# Allegro board TinyADK-1312B-PCB.brd
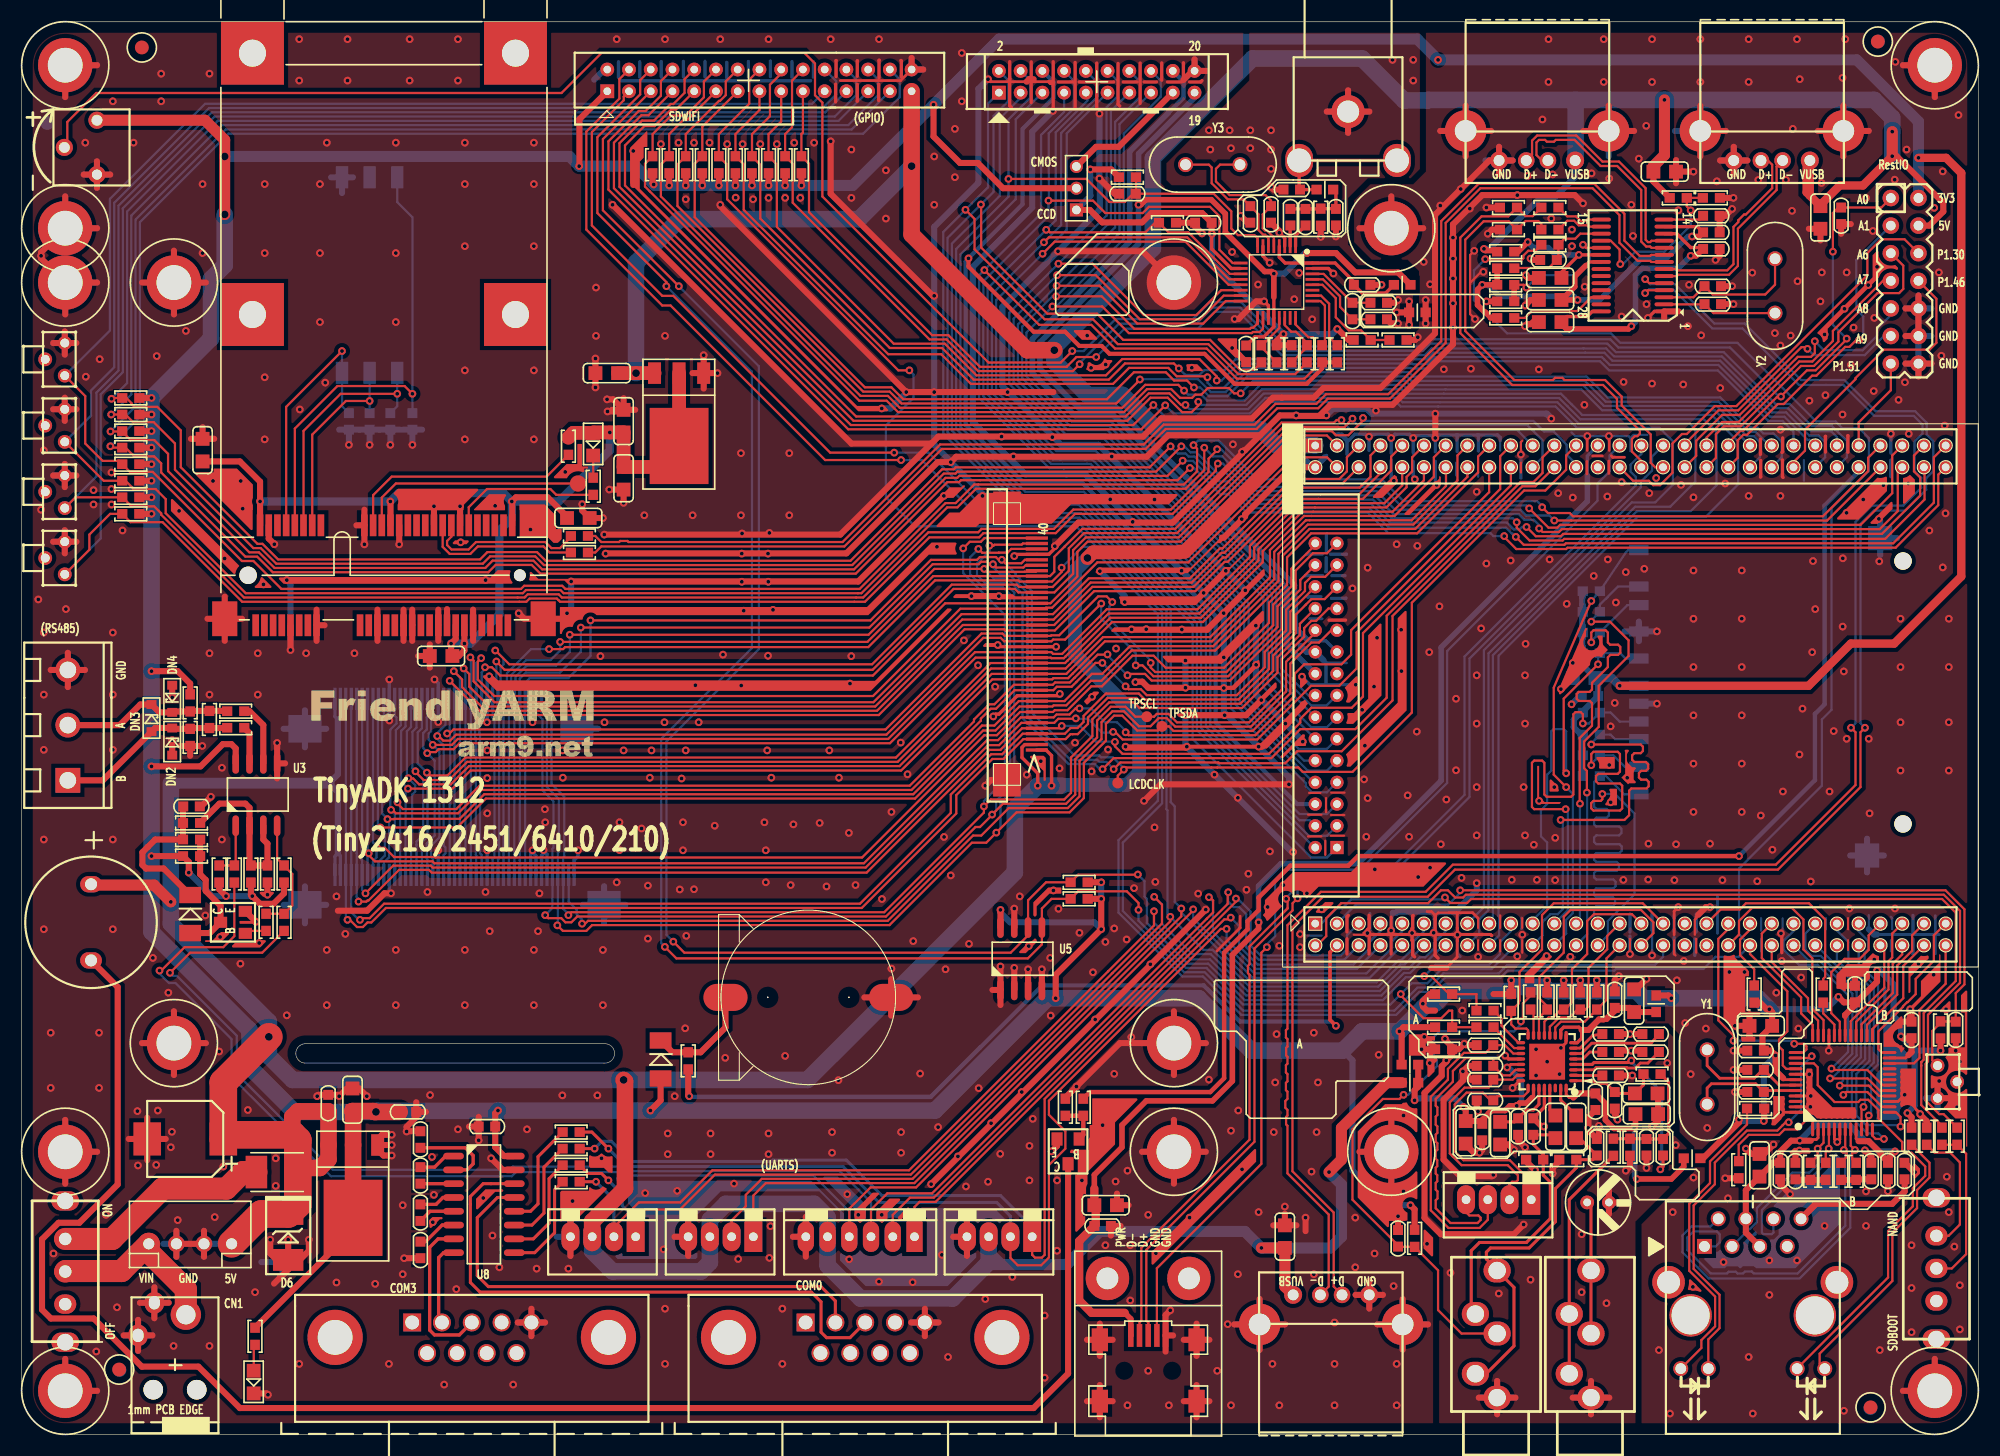
[diagram p0: board, top side]
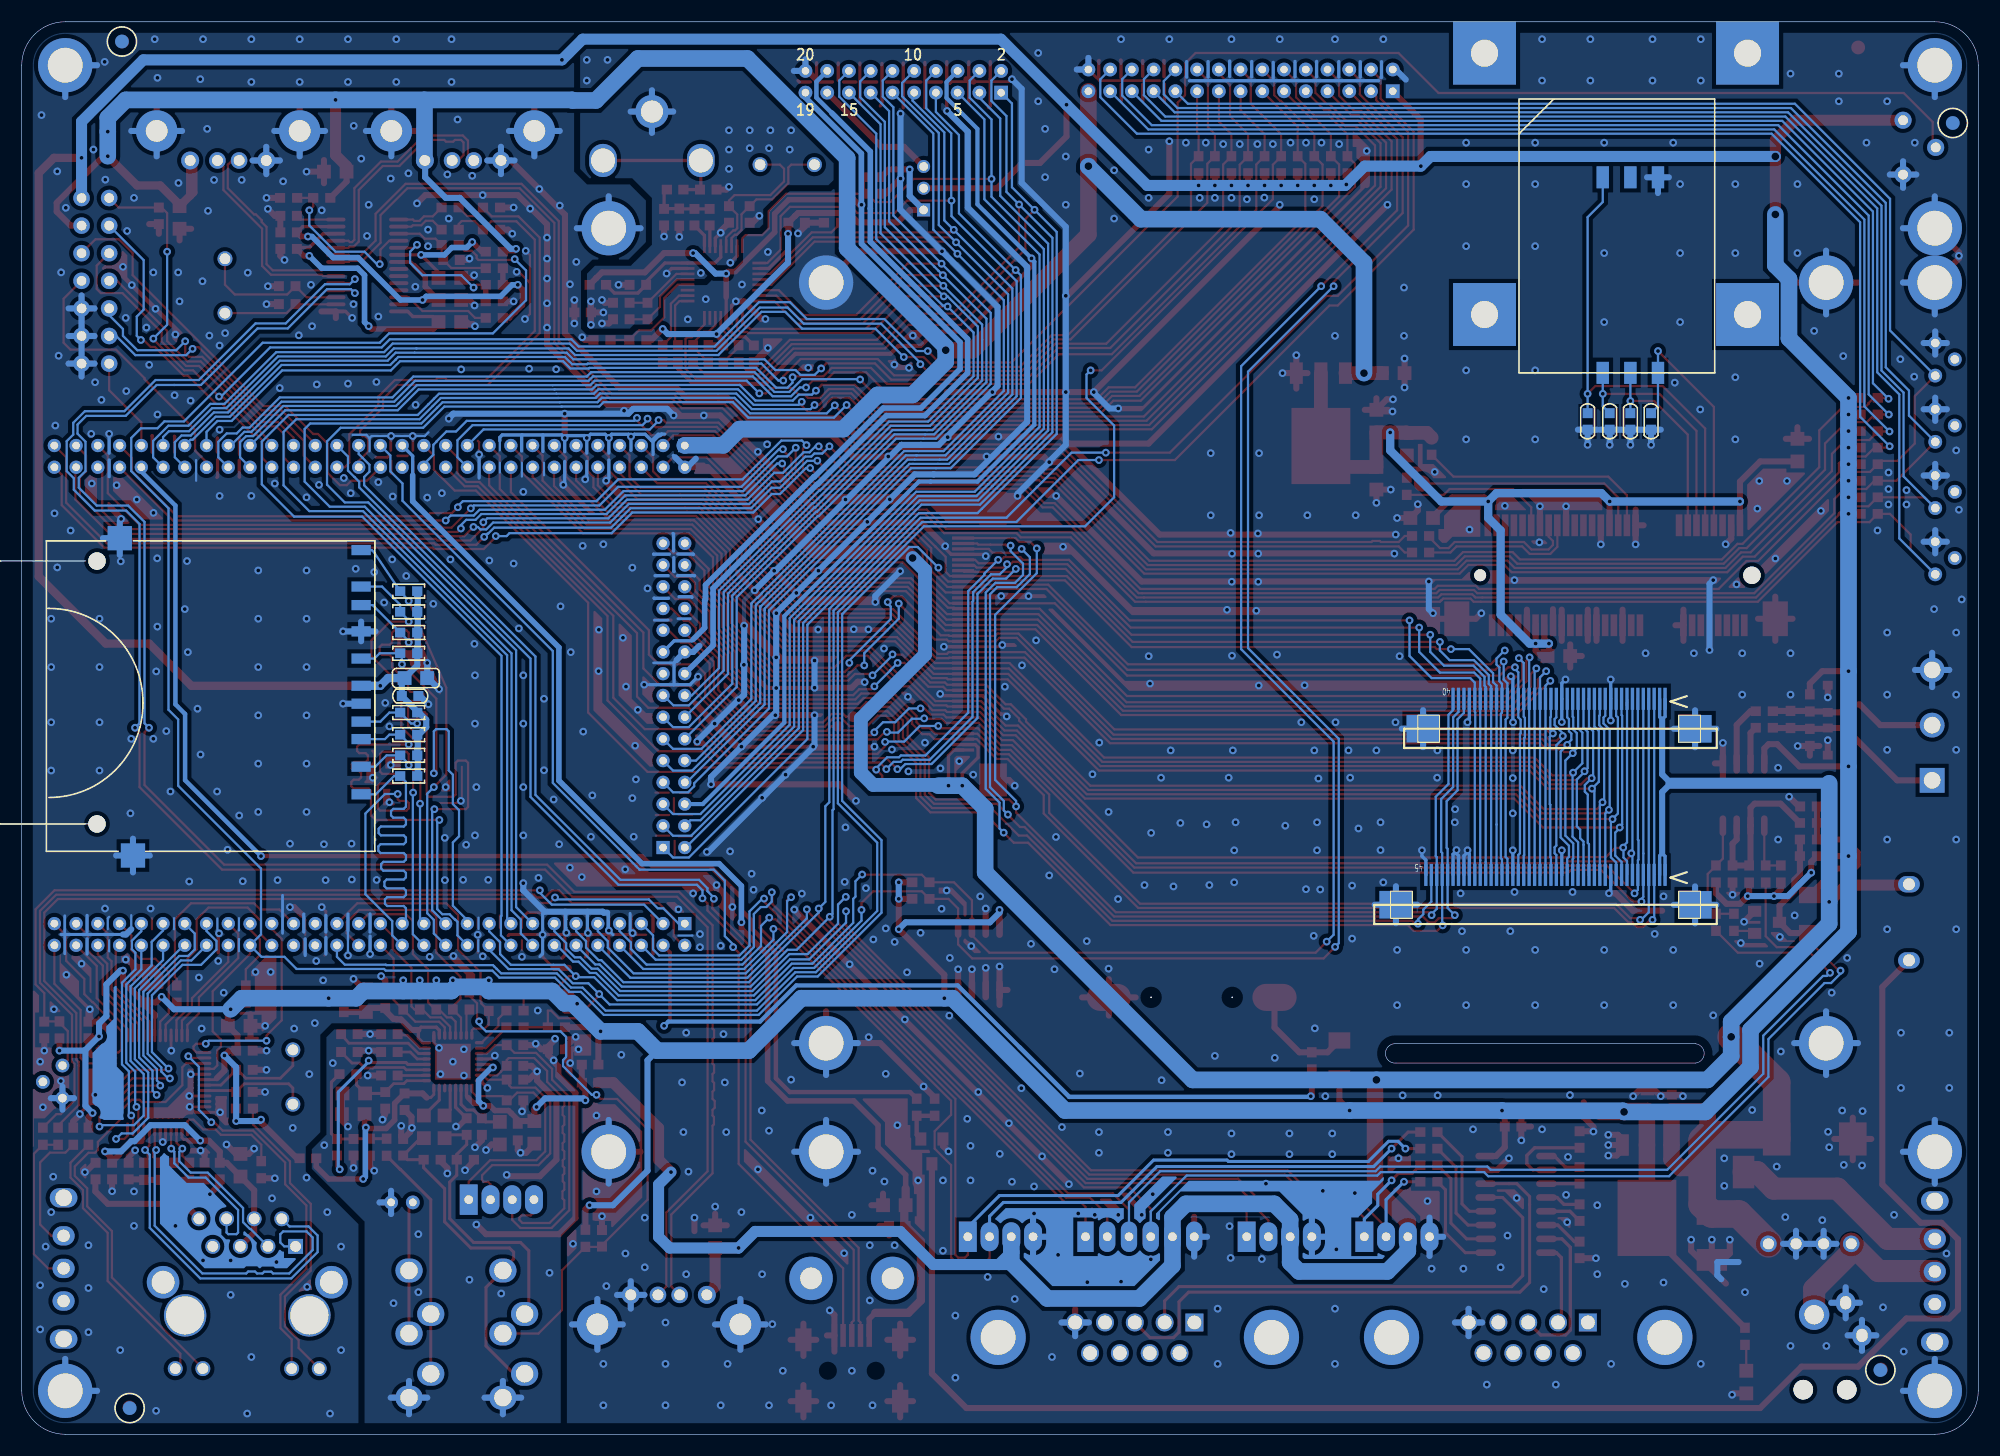
[diagram p1: board, bottom side, seen from below]

Outline 180 x 130 mm; copper layers: TOP, BOTTOM. Coordinates in mm from the lower left corner of the outline.
Outline path: 0,126 0,4 arc(1.17,1.17) 4,0 176,0 arc(178.83,1.17) 180,4 180,126 arc(178.83,128.83) 176,130 4,130 arc(1.17,128.83) 0,126 ; 26.01,35.94 53.57,35.94 arc(54.54,35.05) 53.57,34.16 26.01,34.16 arc(25.21,35.05) 26.01,35.94

## Design rules (mm)
net group PWR_PH: nets VDD_5V

## Placement (name value [footprint] x y rotation side)
AVIN  -  [TVOUT]  117.52 117.23 270 top
BAT1  3V-BATTERY  [BAT600]  64.74 40.21 90 top
BUZZER1  Buzzer  [SPEAKER]  6.38 50.37 270 top
C7  100pF  [C0603]  14.86 57.78 0 top
C8  220uF/16V  [CAP-D6M3]  18.54 27.18 180 top
C9  104  [C0603]  28.19 29.72 90 top
C10  10uF  [C0805]  30.43 29.74 90 top
C11  104  [C0603]  34.77 29.67 0 top
C12  104  [C0603]  177.93 37.97 270 top
C15  10uF  [C0805]  161.04 37.59 180 top
C16  104  [C0603]  173.86 36.45 90 top
C17  104  [C0603]  168.66 39.75 90 top
C18  104  [C0603]  160.27 35.31 180 top
C19  15pF  [C0603]  160.28 33.54 180 top
C20  15pF  [C0603]  160.28 31.51 180 top
C21  104  [C0603]  173.21 24.99 270 top
C22  10uF  [C0805]  159.88 23.72 90 top
C23  104  [C0603]  171.69 24.99 270 top
C24  104  [C0603]  161.78 24.99 270 top
C25  104  [C0603]  170.16 23.46 90 top
C26  104  [C0603]  163.18 23.46 90 top
C29  104  [C0603]  134.37 28.57 270 top
C30  10uF  [C0805]  132.84 28.83 270 top
C31  104  [C0603]  144.78 31.37 270 top
C32  10uF  [C0805]  148.46 29.46 0 top
C33  100pF  [C0603]  139.06 27.56 90 top
C34  100pF  [C0603]  144.91 25.65 90 top
C35  104  [C0603]  126.62 17.27 90 top
C36  1uF  [C0603]  151 27.18 270 top
C37  100pF  [C0603]  135.38 30.73 180 top
C38  100pF  [C0603]  135.38 32.64 180 top
C39  104  [C0603]  36.68 23.06 90 top
C40  104  [C0603]  36.68 27.89 270 top
C41  220pF  [C0603]  149.48 27.18 270 top
C42  1uF  [C0603]  149.1 35.18 0 top
C43  1uF  [C0603]  145.41 35.18 0 top
C44  1uF  [C0603]  145.41 33.02 0 top
C45  1uF  [C0603]  145.41 36.83 0 top
C46  1uF  [C0603]  150.62 36.83 180 top
C47  100pF  [C0603]  135.38 33.91 180 top
C48  100pF  [C0603]  135.38 35.81 180 top
C49  104  [C0603]  36.68 16.21 90 top
C50  104  [C0603]  146.56 39.24 90 top
C51  10uF  [C0805]  98.68 21.08 0 top
C52  104  [C0603]  98.68 19.18 0 top
C53  104/NC  [C0603]  118.11 112.78 270 top
C54  10uF  [C0805]  148.34 38.86 90 top
C55  10uF  [C0805]  143 29.34 270 top
C56  10uF  [C0805]  141.1 29.34 270 top
C57  10uF  [C0805]  136.02 26.67 90 top
C58  104  [C0603]  137.67 29.08 270 top
C59  10uF  [C0805]  150.5 31.37 180 top
C60  104  [C0603]  146.56 31.5 270 top
C61  104  [C0603]  36.68 21.16 270 top
C62  104  [C0603]  143.51 67.94 0 bottom
C63  104  [C0603]  116.71 112.78 270 top
C64  104  [C0603]  167.39 112.9 270 top
C65  330pF  [C0603]  120.9 112.78 270 top
C67  10uF  [C0805]  144.78 69.6 180 bottom
C68  104  [C0603]  43.56 28.32 180 top
C73  10uF  [C0805]  165.48 113.03 270 top
C76  33pF  [C0603]  30.1 93.98 270 bottom
C77  33pF  [C0603]  33.91 93.98 270 bottom
C78  33pF  [C0603]  35.94 93.98 270 bottom
C79  33pF  [C0603]  32 93.98 270 bottom
C96  10uF  [C0805]  150.11 116.2 0 top
C97  10uF  [C0805]  116.21 17.15 90 top
C104  330pF  [C0603]  117.6 114.55 180 top
C105  104  [C0603]  107.95 111.51 0 top
C106  104  [C0603]  112.65 98.68 90 top
C107  104  [C0603]  124.08 105.79 180 top
C108  22pF  [C0603]  113.03 113.03 270 top
C109  22pF  [C0603]  114.94 113.03 270 top
C110  1uF  [C0603]  122.43 102.62 90 top
C111  1uF  [C0603]  125.6 102.62 180 top
C112  1uF  [C0603]  125.6 104.14 180 top
C113  104  [C0603]  100.97 114.17 0 top
C137  NC  [C0603]  154.81 104.01 0 top
C142  NC  [C0603]  154.81 105.66 0 top
C143  10uF  [C0805]  55.37 92.2 90 top
C144  10uF  [C0805]  39.62 71.63 180 top
C145  10uF  [C0805]  139.57 102.36 0 top
C146  104  [C0603]  156.21 109.09 180 top
C147  10uF  [C0805]  139.57 106.43 0 top
C148  10uF  [C0805]  50.16 84.33 0 top
C149  10uF  [C0805]  16.64 89.53 90 top
C150  10uF  [C0805]  55.37 89.03 270 top
C151  10uF  [C0805]  54.86 97.66 180 top
C153  10uF  [C0805]  139.57 104.39 0 top
C161  104  [C0603]  156.21 110.62 180 top
C162  104  [C0603]  141.22 108.08 180 top
CAMERA  SIP10x2s  [SDWIFI-NH]  98.9 124.48 0 top
CN1  -  [DC023B]  14.1 6.35 90 top
COM0  -  [DB9RA_M]  77.6 10.29 90 top
COM3  -  [DB9RA_M]  41.4 10.29 90 top
CON1  -  [PH-4A]  92.96 18.18 180 top
CON2  -  [PH-6A]  82.13 18.18 180 top
CON3  -  [PH-4A]  67.31 18.18 180 top
CON4  -  [PH-4A]  56.48 18.18 180 top
CON5  -  [2510-4A]  15.5 17.53 180 top
CON6  SIP7X2  [SIP7X2-2]  173.23 106.16 270 top
CON8  MF210_miniPCIe  [MINI_PCIEX1-52P-4H]  33.32 79.06 0 top
CON10  SD/MMC CARD  [SDCARD]  167.33 61.27 0 bottom
CON11  B2L-508-3P  [DP3-5]  4.24 65.27 90 top
CON12  -  [PH-4A]  138.88 21.59 180 top
CON13  SIP15x2s  [SIP30S]  62.87 124.61 0 top
D1  1N4148  [D1206]  58.77 32.73 90 top
D2  1N4148  [D1206]  15.49 46.12 90 top
D4  Green-LED  [LED0805]  52.57 92.16 270 top
D6  TVS-5.6V  [DO-214AA-SMB]  24.51 18.16 270 top
DN2  TVS-DUAL/NC  [SOD-323-12]  13.84 63.75 90 top
DN3  TVS-DUAL/NC  [SOD-323-12]  11.94 65.91 90 top
DN4  TVS-DUAL/NC  [SOD-323-12]  13.84 67.69 270 top
F1  2A  [F3528]  23.62 24.38 0 top
FB1  0R/NC  [L0603]  127.71 34.02 0 top
FB2  0R  [L0603]  153.67 25.4 180 top
FB3  0R  [L0603]  127.71 32.36 0 top
FB5  0R  [L0603]  150.37 39.62 270 top
H1  Hole  [H1]  4 4 0 top
H2  Hole  [H1]  4 126 0 top
H3  Hole  [H1]  176 126 0 top
H4  Hole  [H1]  176 4 0 top
H5  Hole  [H1]  4 26 0 top
H6  Hole  [H1]  106 26 0 top
H7  Hole  [H1]  4 106 0 top
H8  Hole  [H1]  4 111 0 top
H9  Hole  [H1]  14 36 0 top
H10  Hole  [H1]  14 106 0 top
H11  Hole  [H1]  106 36 0 top
H12  Hole  [H1]  126 26 0 top
H13  Hole  [H1]  106 106 0 top
H14  Hole  [H1]  126 111 0 top
ID1  ID-BOARD  [FM4P]  9 5.91 180 bottom
ID2  ID-BOARD  [FM4P]  170.76 128.18 0 top
ID3  ID-BOARD  [FM4P]  170.78 128.18 180 bottom
ID4  ID-BOARD  [FM4P]  170.09 2.48 0 top
ID5  ID-BOARD  [FM4P]  2.34 120.68 180 bottom
ID6  ID-BOARD  [FM4P]  11.05 127.64 0 top
ID7  ID-BOARD  [FM4P]  170.07 2.41 180 bottom
ID8  ID-BOARD  [FM4P]  8.96 5.96 0 top
J1  SIP3s  [SIP3S]  97.03 112.68 90 top
K1  -  [KEY-A06]  2.16 98.93 270 top
K2  -  [KEY-A06]  2.16 92.84 270 top
K3  -  [KEY-A06]  2.16 86.74 270 top
K4  -  [KEY-A06]  2.16 80.64 270 top
L6  0R  [L0603]  119.89 114.55 0 top
L8  0R  [L0603]  127 105.79 180 top
L9  0R  [L0603]  128.4 103.25 0 top
LAN1  -  [HR911105A]  159.26 21.44 180 top
LCD1  FPC-P05-45P  [CON-FPC-P05-45P]  25.65 52.45 0 bottom
LCD2  FPC-P05-40P  [CON-FPC-P05-40P]  94.36 59.82 90 top
LCD3  FPC-P05-40P  [CON-FPC-P05-40P]  25.65 68.66 0 bottom
LCDCLK  Test Point  [TPC1]  100.84 59.94 0 top
LED_3.3  Red-LED  [LED0805]  21.34 5.84 270 top
MIC1  MIC  [MIC2]  144.02 21.34 0 top
MIC2  PHONEJACK-Pink  [EARJACK5]  144.27 16.24 270 top
MINIUSB1  MiniUSB  [MINIUSB_ANT]  103.63 5.84 0 top
NOREF  -  []  26.02 61.54 0 top
P2  SIMCARD  [SIM-0011]  34.75 115.69 180 bottom
PERST_N  Test Point  [PADC15]  51.18 87.5 0 top
Q2  MMBT3904AL  [SOT-23-Q]  96.27 26.04 180 top
Q3  MMBT3904AL  [SOT-23-Q]  19.43 47.12 90 top
R1  0R  [R0603]  176.66 27.43 90 top
R2  0R  [R0603]  178.05 27.43 270 top
R3  0R  [R0603]  175.26 27.43 270 top
R4  1K  [R0603]  21.46 9.02 270 top
R5  10K  [R0603]  159.38 40.51 270 top
R6  1K  [R0603]  97.66 30.1 90 top
R7  0R  [R0603]  165.74 40.51 90 top
R8  6.8K,1%  [R0603]  157.97 24.35 270 top
R9  10K  [R0603]  97.28 50.8 180 top
R10  10K  [R0603]  97.28 49.28 180 top
R11  0R  [R0603]  61.32 34.37 270 top
R12  10K  [R0603]  59.56 116.84 270 top
R13  10K  [R0603]  62.61 116.84 270 top
R14  10K  [R0603]  65.66 116.84 270 top
R15  10K  [R0603]  176.53 37.21 270 top
R16  10K  [R0603]  96.01 30.1 270 top
R17  10K/NC  [R0603]  21.08 51.56 90 top
R18  10K  [R0603]  68.71 116.84 270 top
R19  10K  [R0603]  71.73 116.84 270 top
R20  1K  [R0603]  159.51 29.98 180 top
R21  1K  [R0603]  173.86 27.43 270 top
R22  100K  [R0603]  15.49 64.14 90 top
R23  10K  [R0603]  61.09 116.84 90 top
R24  51R  [R0603]  167.37 24.2 270 top
R25  51R  [R0603]  168.77 24.2 270 top
R26  51R  [R0603]  164.57 24.2 270 top
R27  10K  [R0603]  58.04 116.84 90 top
R28  10K  [R0603]  64.14 116.84 90 top
R29  51R  [R0603]  165.97 24.2 270 top
R30  10K/NC  [R0603]  22.61 51.56 270 top
R31  120R/NC  [R0603]  17.27 65.79 90 top
R32  100K  [R0603]  15.49 67.31 90 top
R33  10R  [R0603]  19.68 65.02 180 top
R34  10K  [R0603]  67.18 116.84 90 top
R35  10K  [R0603]  10.03 89.28 0 top
R36  10R  [R0603]  19.68 66.55 180 top
R37  10K  [R0603]  10.03 87.76 0 top
R38  10K  [R0603]  144.4 62.48 180 bottom
R39  10K  [R0603]  10.03 86.23 0 top
R40  10K  [R0603]  10.03 84.71 0 top
R41  10K  [R0603]  144.4 71.88 180 bottom
R42  10K  [R0603]  144.4 64.39 180 bottom
R43  10K  [R0603]  10.03 95.38 180 top
R44  0R  [R0603]  24.13 47.12 90 top
R45  0R  [R0603]  19.56 51.56 90 top
R46  10K  [R0603]  142.24 25.27 0 top
R47  10K  [R0603]  139.19 25.27 0 top
R48  100K  [R0603]  24.13 51.56 90 top
R49  100K  [R0603]  128.14 18.03 90 top
R50  10K  [R0603]  15.62 53.21 0 top
R51  4.7K  [R0603]  22.48 47.12 270 top
R52  1M  [R0603]  15.62 54.74 0 top
R53  0R  [R0603]  15.62 56.26 180 top
R54  75R  [R0603]  119.51 112.01 270 top
R55  10K  [R0603]  50.29 90.93 90 top
R56  0R  [R0603]  50.55 27.81 180 top
R57  0R  [R0603]  134.62 38.99 0 top
R58  0R  [R0603]  134.62 37.47 0 top
R59  2.2K  [R0603]  149.99 33.15 180 top
R60  10K  [R0603]  70.23 116.84 90 top
R61  200R  [R0603]  52.58 87.25 90 top
R62  47K/NC  [R0603]  147.96 26.42 90 top
R63  0R  [R0603]  130.81 35.43 0 top
R64  10K  [R0603]  10.03 93.85 180 top
R65  10K  [R0603]  10.03 92.33 180 top
R66  10K  [R0603]  10.03 90.81 180 top
R67  100R  [R0603]  146.43 26.42 90 top
R68  0R  [R0603]  51.31 82.68 0 top
R69  0R  [R0603]  51.31 81.15 0 top
R70  0R  [R0603]  50.55 26.29 180 top
R71  10K  [R0603]  144.4 66.42 180 bottom
R72  10K  [R0603]  144.4 75.69 180 bottom
R73  10K  [R0603]  144.4 73.79 180 bottom
R74  10K  [R0603]  144.4 60.58 180 bottom
R75  0R  [R0603]  50.55 23.24 180 top
R76  0R  [R0603]  50.55 24.77 180 top
R77  10K  [R0603]  144.4 77.6 180 bottom
R78  10K  [R0603]  18.16 51.56 90 top
R92  0R  [R0603]  138.81 39.88 270 top
R103  2.7K,1%  [C0603]  154.69 112.14 0 top
R104  0R  [R0603]  140.59 110.87 180 top
R105  0R  [R0603]  140.59 112.9 180 top
R106  NC  [R0603]  140.59 109.47 180 top
R107  100K  [R0603]  136.53 107.31 180 top
R108  10K  [R0603]  152.4 113.79 0 top
R109  15K  [R0603]  136.78 112.9 0 top
R110  15K  [R0603]  136.78 110.87 0 top
R111  20K  [R0603]  155.45 113.79 0 top
R114  10K  [R0603]  136.53 105.79 0 top
R115  NC  [R0603]  136.53 104.27 180 top
R116  10K  [R0603]  136.53 102.74 180 top
R117  0R  [R0603]  136.53 108.84 180 top
R126  2.2K  [R0603]  130.81 37.47 180 top
R127  2.2K  [R0603]  130.81 40.51 180 top
R128  10K  [R0603]  137.03 39.75 90 top
R129  10K  [R0603]  140.34 39.88 90 top
R131  10K  [R0603]  141.86 39.88 90 top
R132  10K  [R0603]  143.38 39.88 90 top
R133  10K  [R0603]  144.91 39.88 90 top
R137  0R  [R0603]  121.03 99.44 270 top
R138  NC  [R0603]  119.63 99.44 270 top
R139  10K  [R0603]  105.41 111.51 180 top
R140  0R  [R0603]  114.05 99.44 90 top
R141  0R  [R0603]  118.24 99.44 90 top
R142  10K  [R0603]  126.62 100.71 180 top
R143  1.2K/NC  [R0603]  115.44 99.44 270 top
R144  1.2K/NC  [R0603]  116.84 99.44 90 top
R145  0R  [R0603]  123.32 100.71 0 top
R146  10K  [R0603]  101.73 115.7 0 top
RST  -  [KEY-A06]  178.05 32.44 90 top
S1  SW-DIP4  [SW35]  4 15 270 top
S2  SW-DIP4  [SW35]  176.15 15.24 90 top
SPK1  PHONEJACK-Green  [EARJACK5]  135.64 16.24 270 top
TINYBOARD  TinyCore  [TINY6410_2]  116 43 0 top
TPSCL  TP  [TPC1]  103.5 66.04 0 top
TPSDA  TP  [TPC1]  104.9 65.15 0 top
U2  AMS1086CM-3.3  [TO-252]  32.74 26.62 180 top
U3  SP3485  [SOP8]  19.68 56.01 90 top
U4  DM9000AEP  [LQFP48FA]  167.51 32.38 0 top
U5  AT24LC04  [SOP8]  90.04 40.89 90 top
U6  WM8960GEFL  [QFN32-19P7-TH]  140.34 34.29 180 top
U8  SP3232  [SOP16]  39.73 25.6 0 top
U9  TVP5150  [S-PQFP-G32]  115.44 106.05 270 top
U17  AMS1086CM-3.3  [TO-252]  62.74 97.66 180 top
U52  FE1.1s  [TSSOP28-25P6X228]  148.21 107.57 90 top
USBH1  USB -A2  [USB-A2]  164.5 117.23 0 top
USBH2  USB -A2  [USB-A2]  142.91 117.23 0 top
USBH3  USB -A2  [USB-A2]  116.97 12.83 180 top
W1  10K  [VR3_7X7]  5.92 117.3 90 top
Y1  25MHz  [OSC2PR-1]  155.06 35.32 270 top
Y2  12MHz  [OSC2PR-1]  161.3 103.25 90 top
Y3  14.31818MHz  [OSC2PR-1]  112.01 116.85 180 top

## Library data of the parts
AVIN = TVOUT
BAT1 = BATTERY_3
BUZZER1 = SPEAKER
C7 C9 C11 C12 C16-C21 C23-C26 C29-C50 C52-C65 C68 C73 C76-C79 C96 C97 C104-C113 C137 C142-C151 C153 C161 C162 = CAP NP
C8 C10 C15 C22 C51 C67 = CAP
CAMERA = CON20A
CN1 = CON3_3
COM0 COM3 = CONNECTOR DB9_2
CON1 CON3-CON5 = CON4
CON2 = CON6
CON6 = CON14A
CON8 = CON50A_5
CON10 = SD_0
CON11 J1 = CON3
CON12 = J1X4_1
CON13 = CON20A_5
D1 = DIODE
D2 = DIODE_1
D4 LED_3.3 = LED
D6 = DIODE ZENER1_8
DN2-DN4 = DTVS_DUAL_CA_KKJ_1
F1 = FUSE
FB1-FB3 FB5 L6 L8 L9 = INDUCTOR
H1-H14 = CON1
ID1-ID8 = ID-BOARD
K1-K4 RST = SW PUSHBUTTON_0
LAN1 = HR911105A
LCD1 = LCD-888_1
LCD2 LCD3 = LCD-888_2
LCDCLK PERST_N TPSCL TPSDA = TP
MIC1 = MIC
MIC2 SPK1 = PHONEJACK STEREO SW
MINIUSB1 = USB_A/B_2
P2 = SIMCARD
Q2 Q3 = NPN-BEC
R1-R47 R49 R53 R55-R78 R92 R103-R111 R114-R117 R126-R129 R131-R133 = R
R48 R50-R52 R54 R137-R146 = RESISTOR
S1 S2 = CON5
TINYBOARD = TinyCore
U2 U17 = AMS1117
U3 = SP3485
U4 = DM9000AEP
U5 = AT24LC04
U6 = WM8960GEFL_0
U8 = SP3232
U9 = TVP5150
U52 = CON28C_1
USBH1-USBH3 = USBPORT_0
W1 = RESISTOR VAR_0
Y1-Y3 = CRYSTAL

## Footprints (pads in the part's own frame, mm; a bottom-side part is the same pattern mirrored in y, then rotated)
2510-4A
  round 1.524 hole 1.016: 1(-3.81,0) 2(-1.27,0) 3(1.27,0) 4(3.81,0)
BAT600
  oval 2.489x4.064 smd: 1(0,0) 2(0,-15.24)
  round 0.127 hole 1.194: 3(0,-3.886) 4(0,-11.354)
C0603
  rect 0.914x0.914 smd: 1(0,0) 2(1.524,0)
C0805
  rect 1.27x1.27 smd: 1(0,0) 2(2.083,0)
CAP-D6M3
  rect 2.54x3.048 smd: 1(0,0) 2(7,0)
CON-FPC-P05-40P
  rect 0.305x2.032 smd: 1(3.16,0.968) 2(3.66,0.968) 3(4.16,0.968) 4(4.66,0.968) 5(5.16,0.968) 6(5.66,0.968) 7(6.161,0.968) 8(6.661,0.968) 9(7.161,0.968) 10(7.661,0.968) 11(8.161,0.968) 12(8.661,0.968) 13(9.161,0.968) 14(9.661,0.968) 15(10.162,0.968) 16(10.662,0.968) 17(11.162,0.968) 18(11.662,0.968) 19(12.162,0.968) 20(12.662,0.968) 21(13.162,0.968) 22(13.662,0.968) 23(14.163,0.968) 24(14.663,0.968) 25(15.163,0.968) 26(15.663,0.968) 27(16.163,0.968) 28(16.663,0.968) 29(17.163,0.968) 30(17.663,0.968) 31(18.164,0.968) 32(18.664,0.968) 33(19.164,0.968) 34(19.664,0.968) 35(20.164,0.968) 36(20.664,0.968) 37(21.164,0.968) 38(21.664,0.968) 39(22.165,0.968) 40(22.665,0.968)
  rect 3.048x2.54 smd: A(0.399,3.726) B(25.42,3.713)
CON-FPC-P05-45P
  rect 0.305x2.032 smd: 1(3.16,0.968) 2(3.66,0.968) 3(4.16,0.968) 4(4.66,0.968) 5(5.16,0.968) 6(5.66,0.968) 7(6.16,0.968) 8(6.661,0.968) 9(7.161,0.968) 10(7.661,0.968) 11(8.161,0.968) 12(8.661,0.968) 13(9.161,0.968) 14(9.661,0.968) 15(10.161,0.968) 16(10.662,0.968) 17(11.162,0.968) 18(11.662,0.968) 19(12.162,0.968) 20(12.662,0.968) 21(13.162,0.968) 22(13.662,0.968) 23(14.163,0.968) 24(14.663,0.968) 25(15.163,0.968) 26(15.663,0.968) 27(16.163,0.968) 28(16.663,0.968) 29(17.163,0.968) 30(17.663,0.968) 31(18.163,0.968) 32(18.664,0.968) 33(19.164,0.968) 34(19.664,0.968) 35(20.164,0.968) 36(20.664,0.968) 37(21.164,0.968) 38(21.664,0.968) 39(22.164,0.968) 40(22.665,0.968) 41(23.165,0.968) 42(23.665,0.968) 43(24.165,0.968) 44(24.665,0.968) 45(25.165,0.968)
  rect 3.048x2.54 smd: A(0.399,3.726) B(27.92,3.714)
D1206
  rect 1.5x2 smd: 1(0.009,-0.006) 2(3.51,-0.006)
DB9RA_M
  rect 1.651x1.651 hole 1.27: 1(0,5.486)
  round 1.651 hole 1.27: 2(0,2.743) 3(0,0) 4(0,-2.743) 5(0,-5.486) 6(-2.819,4.115) 7(-2.819,1.372) 8(-2.819,-1.372) 9(-2.819,-4.115)
  round 5.08 hole 3.2: 10(-1.372,12.573) 11(-1.372,-12.573)
DC023B
  round 1.803 hole 1.803 unplated: (-2.25,2) (-2.25,-2)
  round 2.794 hole 1.778: 1(4.65,-1)
  oval 1.981x1.778 hole 1.219x1.016: 2(5.75,1.9) 3(2.75,3.4)
DO-214AA-SMB
  rect 2.007x2.794 smd: 1(2.115,0) 2(-2.115,0)
DP3-5
  rect 2.286x2.286 hole 1.524: 1(-5.08,0)
  round 2.286 hole 1.524: 2(0,0) 3(5.08,0)
EARJACK5
  oval 2.2x2.5 hole 1.6: 1(5.17,-1.903) 2(6.97,0.097) 3(1.17,0.097) 4(10.67,-1.903) 5(12.87,0.097)
F3528
  rect 1.981x2.997 smd: 1(-2.032,-0.254) 2(1.778,-0.254)
FM4P
  round 1.27 smd: 1(0,0)
H1
  round 5 hole 3.2: 1(0,0)
HR911105A
  round 3.9 hole 3.5 unplated: (-5.707,10.498) (5.723,10.498)
  rect 1.372x1.372 hole 0.991: 1(4.453,4.148)
  round 1.372 hole 0.991: 2(3.183,1.608) 3(1.913,4.148) 4(0.643,1.608) 5(-0.627,4.148) 6(-1.897,1.608) 7(-3.167,4.148) 8(-4.437,1.608) 9(6.633,15.398) 10(4.093,15.398) 11(-4.077,15.398) 12(-6.617,15.398)
  round 2.997 hole 2.1: M3(-7.737,7.448) M4(7.753,7.448)
KEY-A06
  round 1.27 hole 0.787: 1(1.5,1.8) 2(-1.5,1.8) 3(0,0)
L0603
  rect 0.94x0.889 smd: 1(-0.762,0) 2(0.762,0)
LED0805
  rect 1.27x1.27 smd: 1(0,0) 2(2.083,0)
LQFP48FA
  oval 0.279x1.27 smd: 1(-2.75,-4.327) 2(-2.25,-4.327) 3(-1.75,-4.327) 4(-1.25,-4.327) 5(-0.75,-4.327) 6(-0.25,-4.327) 7(0.25,-4.327) 8(0.75,-4.327) 9(1.25,-4.327) 10(1.75,-4.327) 11(2.25,-4.327) 12(2.75,-4.327) 25(2.75,4.327) 26(2.25,4.327) 27(1.75,4.327) 28(1.25,4.327) 29(0.75,4.327) 30(0.25,4.327) 31(-0.25,4.327) 32(-0.75,4.327) 33(-1.25,4.327) 34(-1.75,4.327) 35(-2.25,4.327) 36(-2.75,4.327)
  oval 1.27x0.279 smd: 13(4.327,-2.75) 14(4.327,-2.25) 15(4.327,-1.75) 16(4.327,-1.25) 17(4.327,-0.75) 18(4.327,-0.25) 19(4.327,0.25) 20(4.327,0.75) 21(4.327,1.25) 22(4.327,1.75) 23(4.327,2.25) 24(4.327,2.75) 37(-4.327,2.75) 38(-4.327,2.25) 39(-4.327,1.75) 40(-4.327,1.25) 41(-4.327,0.75) 42(-4.327,0.25) 43(-4.327,-0.25) 44(-4.327,-0.75) 45(-4.327,-1.25) 46(-4.327,-1.75) 47(-4.327,-2.25) 48(-4.327,-2.75)
MIC2
  round 1.27 hole 0.711: 1(0,0) 2(2,0)
MINI_PCIEX1-52P-4H
  round 1.6 hole 1.6 unplated: (-12.5,0)
  rect 5.791x5.791 hole 2.489: (-12.1,48.05) (-12.1,24) (12.1,48.05) (12.1,24)
  round 1.092 hole 1.092 unplated: (12.5,0)
  rect 0.61x2.007 smd: 1(-11.8,-4.6) 2(-11.4,4.6) 3(-11,-4.6) 4(-10.6,4.6) 5(-10.2,-4.6) 6(-9.8,4.6) 7(-9.4,-4.6) 8(-9,4.6) 9(-8.6,-4.6) 10(-8.2,4.6) 11(-7.8,-4.6) 12(-7.4,4.6) 13(-7,-4.6) 14(-6.6,4.6) 15(-6.2,-4.6) 16(-5.8,4.6) 17(-2.2,-4.6) 18(-1.8,4.6) 19(-1.4,-4.6) 20(-1,4.6) 21(-0.6,-4.6) 22(-0.2,4.6) 23(0.2,-4.6) 24(0.6,4.6) 25(1,-4.6) 26(1.4,4.6) 27(1.8,-4.6) 28(2.2,4.6) 29(2.6,-4.6) 30(3,4.6) 31(3.4,-4.6) 32(3.8,4.6) 33(4.2,-4.6) 34(4.6,4.6) 35(5,-4.6) 36(5.4,4.6) 37(5.8,-4.6) 38(6.2,4.6) 39(6.6,-4.6) 40(7,4.6) 41(7.4,-4.6) 42(7.8,4.6) 43(8.2,-4.6) 44(8.6,4.6) 45(9,-4.6) 46(9.4,4.6) 47(9.8,-4.6) 48(10.2,4.6) 49(10.6,-4.6) 50(11,4.6) 51(11.4,-4.6) 52(11.8,4.6)
  rect 2.311x3.2 smd: M1(-14.65,-4) M2(14.65,-4)
MINIUSB_ANT
  round 4 hole 2 unplated: (-3.75,8.5) (3.75,8.5)
  round 0 hole 0.889 unplated: (-2.2,0) (2.2,0)
  rect 0.508x2.108 smd: 1(-1.6,3.25) 2(-0.8,3.25) 3(0,3.25) 4(0.8,3.25) 5(1.6,3.25)
  rect 1.499x2.108 smd: 6(4.45,2.85) 7(-4.45,2.85) 8(-4.45,-2.8) 9(4.45,-2.8)
OSC2PR-1
  round 1.372 hole 0.991: 1(-0.064,0) 2(4.94,0)
PADC15
  round 1.5 smd: 1(0,0)
PH-4A
  rect 1.651x2.8 hole 0.8: 1(0,0)
  oval 1.651x2.667 hole 0.8: 2(2,0) 3(4,0) 4(6,0)
PH-6A
  rect 1.499x2.8 hole 0.8: 1(0,0)
  oval 1.499x2.8 hole 0.8: 2(2,0) 3(4,0) 4(6,0) 5(8,0) 6(10,0)
QFN32-19P7-TH
  oval 0.813x0.305 smd: 1(-2.425,1.75) 2(-2.425,1.25) 3(-2.425,0.75) 4(-2.425,0.25) 5(-2.425,-0.25) 6(-2.425,-0.75) 7(-2.425,-1.25) 8(-2.425,-1.75) 17(2.425,-1.75) 18(2.425,-1.25) 19(2.425,-0.75) 20(2.425,-0.25) 21(2.425,0.25) 22(2.425,0.75) 23(2.425,1.25) 24(2.425,1.75)
  oval 0.305x0.813 smd: 9(-1.75,-2.425) 10(-1.25,-2.425) 11(-0.75,-2.425) 12(-0.25,-2.425) 13(0.25,-2.425) 14(0.75,-2.425) 15(1.25,-2.425) 16(1.75,-2.425) 25(1.75,2.425) 26(1.25,2.425) 27(0.75,2.425) 28(0.25,2.425) 29(-0.25,2.425) 30(-0.75,2.425) 31(-1.25,2.425) 32(-1.75,2.425)
  rect 3.302x3.302 smd: G1(0,0)
R0603
  rect 0.94x0.889 smd: 1(-0.787,0) 2(0.787,0)
S-PQFP-G32
  rect 1.27x0.254 smd: 1(-3.3,1.75) 2(-3.3,1.25) 3(-3.3,0.75) 4(-3.3,0.25) 5(-3.3,-0.25) 6(-3.3,-0.75) 7(-3.3,-1.25) 8(-3.3,-1.75) 17(3.3,-1.75) 18(3.3,-1.25) 19(3.3,-0.75) 20(3.3,-0.25) 21(3.3,0.25) 22(3.3,0.75) 23(3.3,1.25) 24(3.3,1.75)
  rect 0.254x1.27 smd: 9(-1.75,-3.3) 10(-1.25,-3.3) 11(-0.75,-3.3) 12(-0.25,-3.3) 13(0.25,-3.3) 14(0.75,-3.3) 15(1.25,-3.3) 16(1.75,-3.3) 25(1.75,3.3) 26(1.25,3.3) 27(0.75,3.3) 28(0.25,3.3) 29(-0.25,3.3) 30(-0.75,3.3) 31(-1.25,3.3) 32(-1.75,3.3)
SDCARD
  round 1.6 hole 1.6 unplated: (5.748,-19.095) (5.748,5.104)
  rect 1.778x0.94 smd: 1(-18.552,-0.168) 2(-18.552,-2.708) 3(-18.552,-5.967) 4(-18.552,-7.612) 5(-18.552,-10.119) 6(-18.552,-12.619) 7(-18.552,-15.039) 8(-18.552,-16.744) 9(-18.552,2.372) 10(-18.552,-20.104) 11(-18.552,-4.316)
  rect 2.235x2.235 smd: 12(2.438,8.009) 13(3.652,-21.199)
SDWIFI-NH
  rect 1.27x1.27 hole 0.7: 1(-9,-1)
  round 1.27 hole 0.7: 2(-9,1) 3(-7,-1) 4(-7,1) 5(-5,-1) 6(-5,1) 7(-3,-1) 8(-3,1) 9(-1,-1) 10(-1,1) 11(1,-1) 12(1,1) 13(3,-1) 14(3,1) 15(5,-1) 16(5,1) 17(7,-1) 18(7,1) 19(9,-1) 20(9,1)
SIM-0011
  rect 1.143x2.032 smd: 1(5.28,-18) 2(2.74,-18) 3(0.2,-18) 4(5.28,0) 5(2.74,0) 6(0.2,0)
SIP3S
  rect 1.2x1.2 hole 0.8: 1(0,0)
  round 1.2 hole 0.8: 2(2,0) 3(4,0)
SIP7X2-2
  round 1.524 hole 0.889: 1(-7.62,-1.27) 2(-7.62,1.27) 3(-5.08,-1.27) 4(-5.08,1.27) 5(-2.54,-1.27) 6(-2.54,1.27) 7(0,-1.27) 8(0,1.27) 9(2.54,-1.27) 10(2.54,1.27) 11(5.08,-1.27) 12(5.08,1.27) 13(7.62,-1.27) 14(7.62,1.27)
SIP30S
  rect 1.27x1.27 hole 0.7: 1(-9,-1)
  round 1.27 hole 0.7: 2(-9,1) 3(-7,-1) 4(-7,1) 5(-5,-1) 6(-5,1) 7(-3,-1) 8(-3,1) 9(-1,-1) 10(-1,1) 11(1,-1) 12(1,1) 13(3,-1) 14(3,1) 15(5,-1) 16(5,1) 17(7,-1) 18(7,1) 19(9,-1) 20(9,1) 21(11,-1) 22(11,1) 23(13,-1) 24(13,1) 25(15,-1) 26(15,1) 27(17,-1) 28(17,1) 29(19,-1) 30(19,1)
SOD-323-12
  rect 0.813x0.914 smd: 1(-1.25,0) 2(1.25,0)
SOP8
  oval 1.905x0.61 smd: 1(0,0) 2(0,-1.27) 3(0,-2.54) 4(0,-3.81) 5(5.74,-3.81) 6(5.74,-2.54) 7(5.74,-1.27) 8(5.74,0)
SOP16
  oval 1.905x0.61 smd: 1(0,0) 2(0,-1.27) 3(0,-2.54) 4(0,-3.81) 5(0,-5.08) 6(0,-6.35) 7(0,-7.62) 8(0,-8.89) 9(5.588,-8.89) 10(5.588,-7.62) 11(5.588,-6.35) 12(5.588,-5.08) 13(5.588,-3.81) 14(5.588,-2.54) 15(5.588,-1.27) 16(5.588,0)
SOT-23-Q
  rect 1.016x1.219 smd: B(-1.016,-1.143) C(0,1.143) E(1.016,-1.143)
SPEAKER
  oval 1.5x2 hole 1.1: 1(-0.254,0) 2(6.754,0)
SW35
  oval 1.778x2.54 hole 1.524: 1(-6.477,0) 5(6.523,0)
  oval 1.778x2.032 hole 1.143: 2(-2.977,0) 3(0.023,0) 4(3.023,0)
TINY6410_2
  rect 1.219x1.219 hole 0.711: A1(3,48) B1(3,4) C1(5,11)
  round 1.219 hole 0.711: A2(3,46) A3(5,48) A4(5,46) A5(7,48) A6(7,46) A7(9,48) A8(9,46) A9(11,48) A10(11,46) A11(13,48) A12(13,46) A13(15,48) A14(15,46) A15(17,48) A16(17,46) A17(19,48) A18(19,46) A19(21,48) A20(21,46) A21(23,48) A22(23,46) A23(25,48) A24(25,46) A25(27,48) A26(27,46) A27(29,48) A28(29,46) A29(31,48) A30(31,46) A31(33,48) A32(33,46) A33(35,48) A34(35,46) A35(37,48) A36(37,46) A37(39,48) A38(39,46) A39(41,48) A40(41,46) A41(43,48) A42(43,46) A43(45,48) A44(45,46) A45(47,48) A46(47,46) A47(49,48) A48(49,46) A49(51,48) A50(51,46) A51(53,48) A52(53,46) A53(55,48) A54(55,46) A55(57,48) A56(57,46) A57(59,48) A58(59,46) A59(61,48) A60(61,46) B2(3,2) B3(5,4) B4(5,2) B5(7,4) B6(7,2) B7(9,4) B8(9,2) B9(11,4) B10(11,2) B11(13,4) B12(13,2) B13(15,4) B14(15,2) B15(17,4) B16(17,2) B17(19,4) B18(19,2) B19(21,4) B20(21,2) B21(23,4) B22(23,2) B23(25,4) B24(25,2) B25(27,4) B26(27,2) B27(29,4) B28(29,2) B29(31,4) B30(31,2) B31(33,4) B32(33,2) B33(35,4) B34(35,2) B35(37,4) B36(37,2) B37(39,4) B38(39,2) B39(41,4) B40(41,2) B41(43,4) B42(43,2) B43(45,4) B44(45,2) B45(47,4) B46(47,2) B47(49,4) B48(49,2) B49(51,4) B50(51,2) B51(53,4) B52(53,2) B53(55,4) B54(55,2) B55(57,4) B56(57,2) B57(59,4) B58(59,2) B59(61,4) B60(61,2) C2(3,11) C3(5,13) C4(3,13) C5(5,15) C6(3,15) C7(5,17) C8(3,17) C9(5,19) C10(3,19) C11(5,21) C12(3,21) C13(5,23) C14(3,23) C15(5,25) C16(3,25) C17(5,27) C18(3,27) C19(5,29) C20(3,29) C21(5,31) C22(3,31) C23(5,33) C24(3,33) C25(5,35) C26(3,35) C27(5,37) C28(3,37) C29(5,39) C30(3,39)
TO-252
  rect 1.194x1.981 smd: 1(0,0) 2(2.261,0) 3(4.521,0)
  rect 5.41x7.01 smd: 4(2.261,6.706)
TPC1
  round 1 smd: 1(0,0)
TSSOP28-25P6X228
  oval 0.356x1.778 smd: 1(-4.227,-2.896) 2(-3.576,-2.896) 3(-2.926,-2.896) 4(-2.276,-2.896) 5(-1.626,-2.896) 6(-0.975,-2.896) 7(-0.325,-2.896) 8(0.325,-2.896) 9(0.975,-2.896) 10(1.626,-2.896) 11(2.276,-2.896) 12(2.926,-2.896) 13(3.576,-2.896) 14(4.227,-2.896) 15(4.227,2.896) 16(3.576,2.896) 17(2.926,2.896) 18(2.276,2.896) 19(1.626,2.896) 20(0.975,2.896) 21(0.325,2.896) 22(-0.325,2.896) 23(-0.975,2.896) 24(-1.626,2.896) 25(-2.276,2.896) 26(-2.926,2.896) 27(-3.576,2.896) 28(-4.227,2.896)
TVOUT
  oval 3.048x2.54 hole 2.21: 1(0,0) 2(0,9)
  round 3.048 hole 2.032: 3(-4.5,4.5)
USB-A2
  round 1.651 hole 1: 1(0,0) 4(-7,0)
  round 1.524 hole 1: 2(-2.504,0) 3(-4.498,0)
  round 3.81 hole 2: 5(3.084,2.718) 6(-10.074,2.718)
VR3_7X7
  round 1.575 hole 0.9: 1(-1.36,-1) 2(3.64,-1) 3(1.14,2)

## Nets
AGND: C29.2 C30.2 C31.2 C32.2 C33.2 C34.2 C37.2 C38.2 C41.2 C42.1 C43.2 C44.2 C45.2 C46.2 C47.2 C48.2 C57.1 C58.2 C59.1 C60.2 MIC1.2 MIC2.5(E) R46.1 R47.1 R62.1 R63.2 SPK1.5(E) U6.20(SPKGND2) U6.24(SPKGND1) U6.28(AGND)
AVDD_CCD_1.8V: C107.2 L8.2 U9.4(PLL_AVDD) U9.32(CH2_AVDD)
GND: BAT1.2(-) C7.2 C8.2 C9.2 C10.2 C11.2 C12.2 C15.2 C16.2 C17.2 C18.2 C19.2 C20.2 C21.1 C22.2 C23.2 C24.2 C25.2 C26.2 C35.2 C40.1 C49.1 C50.2 C51.2 C52.2 C54.2 C62.1 C64.2 C67.2 C68.2 C73.2 C76.2 C77.2 C78.2 C79.2 C96.2 C97.2 C105.1 C106.1 C113.1 C137.2 C142.2 C143.2 C144.2 C145.1 C146.1 C147.1 C148.2 C149.2 C150.2 C151.2 C153.1 C161.1 C162.2 CAMERA.20 CN1.2 CN1.3 COM0.5 COM3.5 CON1.4 CON2.6 CON3.4 CON4.4 CON5.2 CON5.3 CON6.10 CON6.12 CON6.14 CON8.4(GND1) CON8.9(GND2) CON8.15(GND3) CON8.18(GND4) CON8.21(GND5) CON8.26(GND6) CON8.27(GND7) CON8.29(GND8) CON8.34(GND9) CON8.35(GND10) CON8.37(GND11) CON8.40(GND12) CON8.43(GND13) CON8.M1 CON8.M2 CON10.3(GND2) CON10.6(GND1) CON10.12(PAD1) CON10.13(PAD2) CON11.3 CON13.2 CON13.30 D6.1(A) DN2.1 DN4.1 H1.1 H2.1 H3.1 H4.1 H5.1 H6.1 H7.1 H8.1 H9.1 H10.1 H11.1 H12.1 H13.1 H14.1 K1.2 K2.2 K3.2 K4.2 L9.2 LCD1.11(GND1) LCD1.20(GND2) LCD1.29(GND3) LCD1.37(GND4) LCD1.38(GND5) LCD1.39(GND6) LCD1.40(GND7) LCD1.45(GND8) LCD1.A LCD1.B LCD2.11(GND1) LCD2.20(GND2) LCD2.29(GND3) LCD2.37(SCL2) LCD2.A LCD2.B LCD3.11(GND1) LCD3.20(GND2) LCD3.29(GND3) LCD3.37(SCL2) LCD3.A LCD3.B LED_3.3.2(CATHODE) MINIUSB1.5(GND) MINIUSB1.6(#6) MINIUSB1.7(#7) MINIUSB1.8(#8) MINIUSB1.9(#9) P2.4(GND) Q2.E(EMITTER) Q3.E(EMITTER) R3.1 R8.2 R16.1 R22.1 R30.2 R63.1 R103.2 R109.1 R110.1 R111.2 R115.2 R139.1 R142.1 RST.2 TINYBOARD.A2 TINYBOARD.C20 U2.1(GND) U3.5(GND) U4.5(AGND2) U4.6(AGND3) U4.15(GND) U4.33(GND2) U4.41(TEST) U4.45(GND1) U4.47(AGND1) U4.48(BGGND) U5.1(A0) U5.2(A1) U5.3(A2) U5.4(GND) U5.7(WP) U6.9(DGND) U6.G1(GND_PADDLE) U8.15(VSS) U9.19(DGND) U17.1(GND) U52.1(VSS) USBH1.4(GND1) USBH1.5(GND3) USBH1.6(GND2) USBH2.4(GND1) USBH2.5(GND3) USBH2.6(GND2) USBH3.4(GND1) USBH3.5(GND3) USBH3.6(GND2) W1.1(A)
GND_EARTH: C21.2 LAN1.8(CHS_GND)
VBAT: BAT1.1(+) D1.2(K) R11.1
VDD_3.3V: C10.1 C11.1 C15.1 C16.1 C17.1 C18.1 C62.2 C67.1 C68.1 CON6.2 CON10.4(VDD) CON13.1 D1.1(A) FB1.1 FB2.1 FB5.1 J1.2 R4.1 R5.2 R9.1 R10.1 R12.2 R13.2 R14.2 R15.2 R17.1 R18.2 R19.2 R20.1 R21.1 R23.1 R27.1 R28.1 R32.2 R34.1 R35.2 R37.2 R38.2 R39.2 R40.2 R41.2 R42.2 R43.1 R48.1 R49.2 R50.1 R60.1 R64.1 R65.1 R66.1 R71.2 R72.2 R73.2 R74.2 R77.2 R78.1 R126.2 R127.2 R128.2 R129.2 R131.2 R132.2 R133.2 U2.2(VOUT) U2.4(TAB) U3.8(VCC) U4.23(VDD1) U4.30(VDD2) U4.42(VDD3) U5.8(VDD) U8.16(VDD) W1.2(B)
VDD_3G_3.3V: C143.1 C144.1 C148.1 C149.1 C150.1 CON8.2(VDD_3V3A) CON8.24(VDD_3V3B) CON8.39(VDD_3V3C) CON8.41(VDD_3V3D) CON8.52(VDD_3V3E) D4.1(ANODE) R55.2 U17.2(VOUT) U17.4(TAB)
VDD_5V: BUZZER1.1 C8.1 C9.1 C73.1 C96.1 C97.1 C151.1 CON1.3 CON2.5 CON3.3 CON4.3 CON5.1 CON6.4 CON13.29 D6.2(K) F1.2 FB3.1 LCD1.1(VDD5V_1) LCD1.2(VDD5V_2) LCD2.1(VDD5V_1) LCD2.2(VDD5V_2) LCD3.1(VDD5V_1) LCD3.2(VDD5V_2) R108.1 R117.2 TINYBOARD.A1 U2.3(VIN) U17.3(VIN) USBH1.1(VBUS) USBH2.1(VBUS) USBH3.1(VBUS)
VDD_AUDIO_A3.3V: C31.1 C32.1 FB2.2 U6.32(AVDD)
VDD_AUDIO_D3.3V: C50.1 C54.1 FB5.2 U6.8(DCVDD) U6.10(DBVDD)
VDD_AUDIO_SPK: C29.1 C30.1 FB1.2 FB3.2 U6.21(SPKVDD2) U6.26(SPKVDD1)
VDD_CAM_1.8V: C106.2 CAMERA.19 L8.1 TINYBOARD.C19 U9.20(DVDD)
VDD_CAM_2.5V: CAMERA.18 TINYBOARD.C18
VDD_CCD_3.3V: C105.2 J1.1 R143.1 R144.2 R145.1 R146.1 U9.10(IO_DVDD)
VDD_CMOS_3.3V: CAMERA.17 J1.3
VDD_IN: CN1.1 CON5.4 S1.3
VDD_RTC_AP: R11.2 TINYBOARD.B4
VDD_USB_1.8V: C145.2 C146.2 U52.12(VD18_O) U52.28(VD18)
VDD_USB_3.3V: C153.2 C161.2 R107.2 R114.1 R116.2 U52.13(VD33) U52.21(VD33_O)
AUDIO_XI2SCDCLK0: R133.1 TINYBOARD.B30 U6.11(MCLK)
AUDIO_XI2SLRCK0: R131.1 TINYBOARD.B31 U6.13(DACLRC)
AUDIO_XI2SSCLK0: R132.1 TINYBOARD.B29 U6.12(BCLK)
AUDIO_XI2SSDI0: R128.1 TINYBOARD.B33 U6.16(ADCDAT)
AUDIO_XI2SSDO0_0: R129.1 TINYBOARD.B32 U6.14(DATDAT)
CAM_A_RESET: C113.2 CAMERA.4 R146.2 TINYBOARD.C4 U9.8(R\E\S\E\T\B\)
CAM_SCL0: CAMERA.2 R140.1 TINYBOARD.C2
CAM_SDA0: CAMERA.1 R141.1 TINYBOARD.C1
CAMERA_A_GPIO2: CAMERA.3 TINYBOARD.C3
CCD_AGND: AVIN.3(GND) C65.2 C104.2 C107.1 C108.2 C109.2 C111.1 C112.1 L9.1 R54.2 U9.3(PLL_AGND) U9.7(NSUB) U9.31(CH1_AGND)
CCD_SCL: R140.2 R143.2 U9.21(SCL)
CCD_SDA: R141.2 R144.1 U9.22(SDA)
DM2-: U52.4(DM4) USBH3.2(D-)
DM3-: U52.6(DM3) USBH1.2(D-)
DM4-: U52.10(DM1) USBH2.2(D-)
DM9000_RX+: LAN1.3(RX+) R26.1 U4.3(RX+)
DM9000_RX-: LAN1.6(RX-) R29.1 U4.4(RX-)
DM9000_TX+: LAN1.1(TD+) R24.1 U4.7(TX+)
DM9000_TX-: LAN1.2(TD-) R25.1 U4.8(TX-)
DP2+: U52.5(DP4) USBH3.3(D+)
DP3+: U52.7(DP3) USBH1.3(D+)
DP4+: U52.11(DP1) USBH2.3(D+)
EARPHONE_DETECT: C35.1 R49.1 R92.1 SPK1.2(B)
LANLED: LAN1.11(LEDY-) U4.39(LED1)
LINKLED: LAN1.10(LEDG-) U4.38(LED2)
M_NRESET: C12.1 R15.1 RST.1 TINYBOARD.B3
MICBIAS: C59.2 C60.1 R59.2 U6.1(MICBIAS)
NET_AVDD25: C22.1 C23.1 C24.1 LAN1.4(CT2) LAN1.5(CT1) U4.2(AVDD25_2) U4.9(AVDD25_1)
NWAIT: R5.1 TINYBOARD.B41
OM1: R1.2 TINYBOARD.B1
RS485A: CON11.2 DN3.2 DN4.2 R31.2 R32.1 R36.2
RS485B: CON11.1 DN2.2 DN3.1 R22.2 R31.1 R33.2
RSRXD0: COM0.2 U8.13(RIN1)
RSRXD3: COM3.2 U8.8(RIN2)
RSTXD0: COM0.3 U8.14(T1OUT)
RSTXD3: COM3.3 U8.7(T2OUT)
SPK_OUT_LN: C38.1 CON12.2 U6.23(SPK_LN)
SPK_OUT_LP: C37.1 CON12.1 U6.25(SPK_LP)
SPK_OUT_RN: C48.1 CON12.3 U6.19(SPK_RN)
SPK_OUT_RP: C47.1 CON12.4 U6.22(SPK_RP)
USB-3G_DP: R68.2 U52.9(DP2)
USB_3G_DM: R69.2 U52.8(DM2)
USIM_CLK: C77.1 CON8.12(USIM_CLK) P2.3(CLK)
USIM_DATA: C78.1 CON8.10(USIM_DATA) P2.6(DATA)
USIM_RST: C79.1 CON8.14(USIM_RESET) P2.2(RST)
USIM_VCC: C76.1 CON8.8(USIM_POWER) P2.1(VCC)
W_DISABLE_N: CON8.20(W_DISABLE_N) R55.1
WIFI0_PD_GPIO: CON13.11 R12.1 TINYBOARD.A41
WIFI0_RESET_GPIO: CON13.12 R27.2 TINYBOARD.A42
XADCAIN0: C64.1 CON6.1 TINYBOARD.A39 W1.3(WIPER)
XADCAIN1: CON6.3 TINYBOARD.A40
XADCAIN6_YM: CON6.5 TINYBOARD.A38
XADCAIN7_YP: CON6.7 TINYBOARD.A37
XADCAIN8_XM: CON6.9 TINYBOARD.A36
XADCAIN9_XP: CON6.11 TINYBOARD.A35
XCICLKENB: CAMERA.5 TINYBOARD.C5
XCIHREF: CAMERA.6 R137.2 R138.2 TINYBOARD.C6
XCIPCLK: CAMERA.8 TINYBOARD.C8 U9.9(SCLK)
XCIVSYNC: CAMERA.7 TINYBOARD.C7 U9.24(VSYNC/PALI)
XCIYDATA0: CAMERA.16 TINYBOARD.C16 U9.18(YOUT0)
XCIYDATA1: CAMERA.15 TINYBOARD.C15 U9.17(YOUT1)
XCIYDATA2: CAMERA.14 TINYBOARD.C14 U9.16(YOUT2)
XCIYDATA3: CAMERA.13 TINYBOARD.C13 U9.15(YOUT3)
XCIYDATA4: CAMERA.12 TINYBOARD.C12 U9.14(YOUT4)
XCIYDATA5: CAMERA.11 TINYBOARD.C11 U9.13(YOUT5)
XCIYDATA6: CAMERA.10 TINYBOARD.C10 U9.12(YOUT6)
XCIYDATA7: CAMERA.9 R139.2 TINYBOARD.C9 U9.11(YOUT7/I2CSEL)
XDACOUT: CON6.13 TINYBOARD.A51
XEINT6_SD0_NWP: CON10.10(WP) R77.1 TINYBOARD.B24
XEINT7: TINYBOARD.B40 U4.34(INT)
XEINT8: CON6.6 TINYBOARD.A30
XEINT9: CON13.16 R28.2 TINYBOARD.B34
XEINT10: LCD1.31(EINT10) LCD2.31(EINT10) LCD3.31(EINT10) TINYBOARD.A22
XEINT11: CON6.8 TINYBOARD.A46
XEINT14: LCD1.43(EINT14) LCD2.40(EINT15) LCD3.40(EINT15) TINYBOARD.C24
XEINT15: LCD1.44(EINT15) TINYBOARD.C22
XEINT16/KP_COL0: CON13.21 K1.1 R35.1 TINYBOARD.A53
XEINT17/KP_COL1: CON13.22 K2.1 R37.1 TINYBOARD.A54
XEINT18/KP_COL2: CON13.23 K3.1 R39.1 TINYBOARD.A55
XEINT19/KP_COL3: CON13.24 K4.1 R40.1 TINYBOARD.A56
XEINT24/KP_ROW0: CON13.25 R43.2 TINYBOARD.A57
XEINT25/KP_ROW1: CON13.26 R64.2 TINYBOARD.A58
XEINT26/KP_ROW2: CON13.27 R65.2 TINYBOARD.A59
XEINT27/KP_ROW3: CON13.28 R66.2 TINYBOARD.A60
XI2CSCL0: CON13.5 R9.2 R57.1 R127.1 TINYBOARD.B19 U5.6(SCL)
XI2CSCL2/IEM_SPWI: LCD1.41(SCL2) LCD2.38(EINT14) LCD3.38(EINT14) TINYBOARD.C23 TPSCL.1
XI2CSDA0: CON13.6 R10.2 R58.1 R126.1 TINYBOARD.B20 U5.5(SDA)
XI2CSDA2/IEM_SCLK: LCD1.42(SDA2) LCD2.39(SDA2) LCD3.39(SDA2) TINYBOARD.C21 TPSDA.1
XM0ADDR0: TINYBOARD.B35
XM0ADDR1: TINYBOARD.B36
XM0ADDR2: R7.2 TINYBOARD.B37
XM0ADDR3: TINYBOARD.B38
XM0CSN1: TINYBOARD.B39 U4.37(CS#)
XM0DATA0: TINYBOARD.B45 U4.18(SD0)
XM0DATA1: TINYBOARD.B46 U4.17(SD1)
XM0DATA2: TINYBOARD.B47 U4.16(SD2)
XM0DATA3: TINYBOARD.B48 U4.14(SD3)
XM0DATA4: TINYBOARD.B49 U4.13(SD4)
XM0DATA5: TINYBOARD.B50 U4.12(SD5)
XM0DATA6: TINYBOARD.B51 U4.11(SD6)
XM0DATA7: TINYBOARD.B52 U4.10(SD7)
XM0DATA8: TINYBOARD.B53 U4.31(SD8)
XM0DATA9: TINYBOARD.B54 U4.29(SD9)
XM0DATA10: TINYBOARD.B55 U4.28(SD10)
XM0DATA11: TINYBOARD.B56 U4.27(SD11)
XM0DATA12: TINYBOARD.B57 U4.26(SD12)
XM0DATA13: TINYBOARD.B58 U4.25(SD13)
XM0DATA14: TINYBOARD.B59 U4.24(SD14)
XM0DATA15: TINYBOARD.B60 U4.22(SD15)
XM0OEN: TINYBOARD.B44 U4.35(IOR#)
XM0WEN: TINYBOARD.B43 U4.36(IOW#)
XMMC0CDN: CON10.11(NCD) R71.1 TINYBOARD.B23
XMMC0DATA0: CON10.7(DAT0) R73.1 TINYBOARD.B25
XMMC0DATA1: CON10.8(DAT1) R72.1 TINYBOARD.B26
XMMC0DATA2: CON10.9(DAT2) R74.1 TINYBOARD.B27
XMMC0DATA3: CON10.1(CD/DAT3) R38.1 TINYBOARD.B28
XMMC2CDN/SPI_MISO2: CON13.15 R14.1 TINYBOARD.A45
XMMC2CLK/SPI_CLK2: CON13.13 R13.1 TINYBOARD.A43
XMMC2CMD/SPI_CSN2: CON13.14 R23.2 TINYBOARD.A44
XMMC2DATA0/SPI_MOSI2: CON13.17 R18.1 TINYBOARD.A47
XMMC2DATA1: CON13.18 R34.2 TINYBOARD.A48
XMMC2DATA2: CON13.19 R19.1 TINYBOARD.A49
XMMC2DATA3: CON13.20 R60.2 TINYBOARD.A50
XMMCCLK0: CON10.5(CLK) R41.1 TINYBOARD.B21
XMMCCMD0: CON10.2(CMD) R42.1 TINYBOARD.B22
XNRSTOUT: LCD1.32(NRESET) LCD2.32(NRESET) LCD3.32(NRESET) R106.2 TINYBOARD.B42 U4.40(PWRST#)
XPWMTOUT0: R6.2 TINYBOARD.A52
XPWMTOUT1: LCD1.30(TOUT1) LCD2.30(TOUT1) LCD3.30(TOUT1) TINYBOARD.A26
XSPICKL1: CON13.9 TINYBOARD.B17
XSPICS1: CON13.10 TINYBOARD.B18
XSPIMISO1: CON13.8 TINYBOARD.B16
XSPIMOSI1: CON13.7 TINYBOARD.B15
XUCTSN1: CON2.2 TINYBOARD.B6
XUHDM: R105.2 R109.2 TINYBOARD.A32
XUHDP: R104.2 R110.2 TINYBOARD.A34
XUODM: MINIUSB1.2(D-) TINYBOARD.A31
XUODP: MINIUSB1.3(D+) TINYBOARD.A33
XUODRVVBUS: TINYBOARD.A28
XUOID: MINIUSB1.4(ID) TINYBOARD.A29
XUOVBUS: C51.1 C52.1 MINIUSB1.1(VBUS) TINYBOARD.A27
XURTSN1: CON2.1 TINYBOARD.B5
XURXD0: CON1.2 R56.1 TINYBOARD.B8
XURXD1: CON2.4 R45.1 TINYBOARD.B10
XURXD2: CON3.2 CON13.4 TINYBOARD.B12
XURXD3: CON4.2 R75.1 TINYBOARD.B14
XUTXD0: CON1.1 R70.1 TINYBOARD.B7
XUTXD1: CON2.3 R44.1 TINYBOARD.B9
XUTXD2: CON3.1 CON13.3 TINYBOARD.B11
XUTXD3: CON4.1 R76.1 TINYBOARD.B13
XVHSYNC: LCD1.35(HSYNC) LCD2.35(HSYNC) LCD3.35(HSYNC) TINYBOARD.A24
XVVCLK: LCD1.36(VCLK) LCD2.36(VCLK) LCD3.36(VCLK) LCDCLK.1 TINYBOARD.A25
XVVD0: LCD1.3(VD0) LCD2.3(VD0) LCD3.3(VD0) TINYBOARD.C25
XVVD1: LCD1.4(VD1) LCD2.4(VD1) LCD3.4(VD1) TINYBOARD.C26
XVVD2: LCD1.5(VD2) LCD2.5(VD2) LCD3.5(VD2) TINYBOARD.A20
XVVD3: LCD1.6(VD3) LCD2.6(VD3) LCD3.6(VD3) TINYBOARD.A19
XVVD4: LCD1.7(VD4) LCD2.7(VD4) LCD3.7(VD4) TINYBOARD.A18
XVVD5: LCD1.8(VD5) LCD2.8(VD5) LCD3.8(VD5) TINYBOARD.A17
XVVD6: LCD1.9(VD6) LCD2.9(VD6) LCD3.9(VD6) TINYBOARD.A16
XVVD7: LCD1.10(VD7) LCD2.10(VD7) LCD3.10(VD7) TINYBOARD.A15
XVVD8: LCD1.12(VD8) LCD2.12(VD8) LCD3.12(VD8) TINYBOARD.C27
XVVD9: LCD1.13(VD9) LCD2.13(VD9) LCD3.13(VD9) TINYBOARD.C28
XVVD10: LCD1.14(VD10) LCD2.14(VD10) LCD3.14(VD10) TINYBOARD.A14
XVVD11: LCD1.15(VD11) LCD2.15(VD11) LCD3.15(VD11) TINYBOARD.A13
XVVD12: LCD1.16(VD12) LCD2.16(VD12) LCD3.16(VD12) TINYBOARD.A12
XVVD13: LCD1.17(VD13) LCD2.17(VD13) LCD3.17(VD13) TINYBOARD.A11
XVVD14: LCD1.18(VD14) LCD2.18(VD14) LCD3.18(VD14) TINYBOARD.A10
XVVD15: LCD1.19(VD15) LCD2.19(VD15) LCD3.19(VD15) TINYBOARD.A9
XVVD16: LCD1.21(VD16) LCD2.21(VD16) LCD3.21(VD16) TINYBOARD.C29
XVVD17: LCD1.22(VD17) LCD2.22(VD17) LCD3.22(VD17) TINYBOARD.C30
XVVD18: LCD1.23(VD18) LCD2.23(VD18) LCD3.23(VD18) TINYBOARD.A8
XVVD19: LCD1.24(VD19) LCD2.24(VD19) LCD3.24(VD19) TINYBOARD.A7
XVVD20: LCD1.25(VD20) LCD2.25(VD20) LCD3.25(VD20) TINYBOARD.A6
XVVD21: LCD1.26(VD21) LCD2.26(VD21) LCD3.26(VD21) TINYBOARD.A5
XVVD22: LCD1.27(VD22) LCD2.27(VD22) LCD3.27(VD22) TINYBOARD.A4
XVVD23: LCD1.28(VD23) LCD2.28(VD23) LCD3.28(VD23) TINYBOARD.A3
XVVDEN: LCD1.33(VDEN) LCD2.33(VDEN) LCD3.33(VDEN) TINYBOARD.A21
XVVSYNC: LCD1.34(VSYNC) LCD2.34(VSYNC) LCD3.34(VSYNC) TINYBOARD.A23
N490506: R57.2 U6.17(SCLK)
N490846: R58.2 U6.18(SDIN)
N563338: C46.1 U6.6(RINPUT2)
N563659: C45.1 U6.7(RINPUT3/JD3)
N565258: C44.1 U6.2(LINPUT3/JD2)
N570115: C43.1 U6.5(RINPUT1)
N579751: C36.2 U6.4(LINPUT1)
N580413: C36.1 C41.1 R59.1 R62.2 R67.2
N605417: C34.1 C55.2 R46.2 SPK1.3(C) SPK1.4(D)
N617320: C33.1 C56.2 R47.2 SPK1.1(A)
N3676300: R1.1 R2.2 S2.3
N3676952: R2.1 TINYBOARD.B2
N3684154: R3.2 S2.4
N3780125: F1.1 S1.2
N3805887: LED_3.3.1(ANODE) R4.2
N3869369: R7.1 U4.32(CMD)
N3921053: C19.1 U4.43(X2) Y1.1
N3921204: C20.1 U4.44(X1) Y1.2
N3925254: R8.1 U4.1(BGRES)
N3968686: C25.1 R24.2 R25.2
N3970814: C26.1 R26.2 R29.2
N3982722: LAN1.9(LEDG+) R20.2
N3983324: LAN1.12(LEDY+) R21.2
N4027687: Q2.B(BASE) R6.1 R16.2
N4771984: C42.2 U6.3(LINPUT2)
N5234173: R92.2 U6.15(ADCLRC/GPIO1)
N5390728: C55.1 U6.31(HP_L)
N5390947: C56.1 U6.29(HP_R)
N5424123: C57.2 C58.1 U6.27(VMID)
N6195963: BUZZER1.2 Q2.C(COLLECTOR)
N9633247: MIC2.1(A) MIC2.4(D) R67.1
N9633353: MIC1.1 MIC2.2(B) MIC2.3(C)
N9742067: C137.1 U52.2(XOUT) Y2.1
N9742085: C142.1 U52.3(XIN) Y2.2
N9742255: R105.1 U52.15(DMU)
N9742263: R103.1 U52.14(REXT)
N9742303: R104.1 U52.16(DPU)
N9742345: C162.1 R106.1 R107.1 U52.17(XRSTJ)
N9742489: R108.2 R111.1 U52.18(VBUSM)
N9742525: R114.2 R115.1 U52.19(BUSJ)
N9742579: R116.1 U52.26(OVCJ)
N9742731: C147.2 R117.1 U52.20(VDD5)
N10063562: CON8.22(PERST_N) PERST_N.1
N10063566: CON8.42(LED_WWAN_N) R61.1
N10063734: D4.2(CATHODE) R61.2
N10063964: CON8.36(USB_DM) R69.1
N10063968: CON8.38(USB_DP) R68.1
N10066551: R70.2 U8.11(T1IN)
N10066555: R56.2 U8.12(ROUT1)
N10066559: R76.2 U8.10(T2IN)
N10066563: R75.2 U8.9(ROUT2)
N10066595: C40.2 U8.2(V+)
N10066607: C49.2 U8.6(V-)
N10066691: C61.1 U8.4(C2+)
N10066695: C61.2 U8.5(C2-)
N10066781: C39.2 U8.1(C1+)
N10066785: C39.1 U8.3(C1-)
N10067809: R45.2 R78.2 U3.1(RO)
N10067871: R17.2 R30.1 R53.1 U3.2(R\E\) U3.3(DE)
N10068007: R36.1 U3.6(A)
N10068035: R33.1 U3.7(B)
N10068079: R44.2 R48.2 R51.1 U3.4(DI)
N10068175: C7.1 D2.2(K) R52.1 R53.2
N10068223: D2.1(A) Q3.C(COLLECTOR) R50.2 R52.2
N10068289: Q3.B(BASE) R51.2
N10071439: AVIN.1(OUT) AVIN.2(~) C104.1 L6.1
N10071515: R142.2 R145.2 U9.28(PDN)
N10071793: C53.2 U9.1(AIP1A)
N10071813: C63.2 U9.2(AIP1B)
N10071839: C53.1 C63.1 C65.1 L6.2 R54.1
N10072069: C109.1 U9.5(XTAL/OSC) Y3.1
N10072077: C108.1 U9.6(XTAL2) Y3.2
N10072153: C110.2 C112.2 U9.30(REFM)
N10072157: C110.1 C111.2 U9.29(REFP)
N10072241: R137.1 U9.26(AVID)
N10072297: R138.1 U9.25(HSYNC)

Pads without a net: BAT1 3 4; COM0 1 4 6 7 8 9 10 11; COM3 1 4 6 7 8 9 10 11; CON8 1 3 5 6 7 11 13 16 17 19 23 25 28 30 31 32 33 44 45 46 47 48 49 50 51; ID1 1; ID2 1; ID3 1; ID4 1; ID5 1; ID6 1; ID7 1; ID8 1; K1 3; K2 3; K3 3; K4 3; LAN1 7 M3 M4; P2 5; RST 3; S1 1 4 5; S2 1 2 5; TINYBOARD C17; U4 19 20 21 46; U6 30; U9 23 27; U52 22 23 24 25 27

## Via types
v1: diameter 0.711, hole 0.356, TOP to BOTTOM, 1259 vias
v2: diameter 1.016, hole 0.711, TOP to BOTTOM, 9 vias

## Routing (per net, layer and track width the routed paths; a pad name or vN(x,y) marks a point on that pad's centre or on a via; arc(x,y) is an arc through that point)
AGND: length 113.8
  TOP w0.305: C33.2 140.08,30.1 U6.28 ; v1(136.47,34.85) 136.78,34.54 U6.20 ; v1(137.16,31.88) 137.82,32.54 U6.24
  TOP w0.508: v1(140.05,28.32) 139.83,28.32 C33.2
  TOP w0.559: MIC1.2 147.09,21.34 ; MIC1.2 146.02,20.27 ; MIC1.2 146.02,22.41 ; R46.1 141.45,25.12 140.84,24.51 v1(140.84,24) ; C31.2 144.15,29.21 144.15,28.32 144.11,28.28 v1(144.11,28.19) 144.11,28.11 144.27,27.94 144.27,27.81 C34.2 145.09,27.36 v1(145.09,28.38) ; v1(133.97,29.72) 133.86,29.83 C37.2 ; v1(149.99,28.32) 150.55,28.88 C32.2 150.55,31.32 C59.1 ; 135.74,1.84 SPK1.5 ; SPK1.5 134.05,3.37 ; SPK1.5 135.74,4.9 ; SPK1.5 137.42,3.37 ; v1(132.59,33.4) 132.59,32.56 130.81,30.78 130.81,25.27 132.33,23.75 135.25,23.75 v1(135.38,23.88) ; v1(132.59,33.4) 133.35,32.64 C38.2 ; v1(132.59,33.4) 133.1,33.91 C47.2 ; R47.1 138.4,25.12 v1(139.22,24.31) ; C44.2 v1(148.17,33.02) ; R63.2 131.6,34.95 v1(131.06,34.42) 131.06,34.29 130.64,33.86 130.64,33 129.06,31.42 129.06,19.91 130.56,18.41 137.29,18.41 v1(138.18,19.3) ; R63.2 131.6,35.66 130.94,36.32 v1(130.94,36.4) ; R63.2 132.21,35.43 v1(132.72,35.94) 132.84,35.81 C48.2 ; v1(147.57,24.26) 147.96,24.64 R62.1 ; C60.2 146.56,29.51 146.65,29.42 146.65,29.26 146.71,29.2 146.71,29.05 v1(146.81,28.96) ; C43.2 147.07,35.31 v1(148.08,35.31) 148.97,35.31 C42.1 ; C41.2 v1(149.48,24.51) ; 144.37,1.84 MIC2.5 ; MIC2.5 146.05,3.37 ; MIC2.5 144.37,4.9 ; MIC2.5 142.69,3.37 ; C57.1 136.78,26.67 v1(137.29,26.16) ; C45.2 v1(147.96,36.83) C46.2 ; C29.2 134.37,26.16 v1(134.11,25.91) 133.6,25.91 132.84,26.67 C30.2 ; v1(138.3,26.42) 137.67,27.05 137.67,27.56
  BOTTOM w0.559: 144.37,1.84 MIC2.5 ; MIC2.5 142.69,3.37 ; MIC2.5 146.05,3.37 ; MIC2.5 144.37,4.9 ; 135.74,1.84 SPK1.5 ; SPK1.5 137.42,3.37 ; SPK1.5 135.74,4.9 ; SPK1.5 134.05,3.37 ; MIC1.2 147.09,21.34 ; MIC1.2 146.02,20.27 ; MIC1.2 146.02,22.41
  vias: v1(131.44,14.86) v1(135.89,12.95) v1(138.81,14.22) v1(143.51,18.41) v1(143.51,13.08) v1(145.8,12.06) v1(151.38,34.16) v1(152.17,26.61)
AVDD_CCD_1.8V: length 13.4
  TOP w0.305: L8.2 125.48,105.03 123.32,105.03 122.56,105.79 122.56,106.07 120.83,107.8 U9.32 116.23,107.8 115.69,108.33 U9.4
GND: length 2108
  TOP w0.203: 136.02,45.47 136.02,44.45 ; 122.56,45.97 123.65,45.97 v1(123.8,46.13) ; 138.05,46.61 138.05,47.5 ; 168.02,45.47 168.02,44.58 ; 154.05,47.5 153.92,47.37 153.92,45.97 ; 152.02,46.48 152.02,47.5 ; 120.43,55.09 121.65,55.09 ; 133.99,46.61 133.99,47.5 ; 133.25,105.97 133.25,103.1 v1(133.71,102.64) ; 133.25,105.97 134.26,106.98 v1(134.47,106.98) ; 133.25,105.97 133.25,108.53 v1(133.63,108.92) ; 118.34,57.02 119.56,57.02 ; 152.15,44.07 152.02,44.2 152.02,45.47 ; 168.02,46.48 168.02,47.5 ; 154.05,45.59 154.05,44.32 ; 131.34,48.01 130.3,48.01 130.05,47.75 ; 137.92,89.41 137.92,88.52 ; 119.99,58.55 119.99,57.25 119.99,57.25 ; 147.96,45.59 v1(147.96,44.2) ; v1(137.92,90.17) 137.92,91.31 138.05,91.44 ; 120.45,56.99 121.67,56.99 ; 118.34,55.02 119.56,55.02 ; 138.05,45.47 138.05,44.32 ; 119.93,54.63 119.93,53.32 ; 136.02,46.61 136.02,47.75 ; 118.44,59.03 119.48,59.03 ; 133.99,45.47 133.99,44.58 ; 120.47,59.05 121.69,59.05
  TOP w0.254: U4.15 172.62,30.63 v1(173.23,31.24) ; 132,48.01 133.48,48.01 133.99,47.5 ; 132,48.01 131.34,48.01 ; 132,48.01 132.06,47.95 132.06,46.61 132.08,46.59 v1(132.08,45.97) 132.08,45.41 132.06,45.39 132.06,43.92 131.06,42.93 ; CON13.30 80.85,124.59 75.31,124.59 ; 142.07,36.22 142.07,36.03 v1(141.6,35.56) v1(140.34,34.29) ; v1(88.9,124.71) 89.13,124.49 94.87,124.49 ; U4.45 v1(164.59,31.14) ; 130.05,47.75 129.69,48.11 129.29,48.11 ; v1(144.03,91.87) 144.02,91.86 144.02,90.55 ; v1(166.24,35.31) 166.26,35.33 U4.33 ; v1(146.02,91.87) 146.05,91.84 146.05,90.55 ; 154.05,47.5 154.05,47.62 154.24,47.82 ; U4.6 167.26,27.13 v1(167.03,26.9) 166.76,27.17 U4.5 ; 152.02,45.97 152.02,46.48 ; 94.87,124.49 94.9,124.46 ; 94.87,124.49 94.48,124.49 ; 147.45,89.92 146.36,89.92 146.24,90.04 ; v1(152.4,48.51) 152.02,48.13 152.02,47.5 ; 144.53,90.04 145.41,90.04 ; U4.41 v1(164.45,33.14) ; v1(161.75,29.63) U4.48 164.06,29.63 v1(164.56,30.14) U4.47 ; 143.99,88.39 143.99,89.53 ; 109.96,44.48 112.09,46.61 112.09,47.68 ; 146.01,88.43 146.01,89.57
  TOP w0.279: 125.98,44.2 v1(125.98,46.35) 125.98,47.6 ; LCD2.20 89.95,72.48 v1(89.79,72.64) ; 135.25,45.9 135.23,45.9 135.13,46 123.93,46 ; LCD2.29 90.05,76.98 v1(89.89,77.14)
  TOP w0.305: 101.35,124.46 102.62,124.46 ; 76.88,126.41 76.87,126.4 76.87,124.98 ; 90.89,124.73 90.87,124.71 ; 90.89,124.73 90.89,122.26 91.06,122.1 ; 90.89,124.73 90.89,126.33 ; 102.89,126.2 102.89,122.48 ; 159.96,88.1 159.98,88.12 159.98,89.64 ; 78.87,124.83 78.87,126.45 78.89,126.47 ; v1(123.8,46.13) 123.49,46.13 ; v1(123.8,46.13) 123.97,45.96 123.97,44.6 123.95,44.59 123.95,44.2 ; v1(123.8,46.13) 123.8,46.43 123.97,46.6 123.97,47.4 123.95,47.41 123.95,47.75 ; 128.02,47.75 127.97,47.7 127.97,46.6 127.91,46.54 v1(127.91,46.13) 127.91,45.46 127.97,45.4 127.97,44.12 128.14,43.94 ; 80.88,126.44 80.92,126.4 80.92,124.92 ; 74.92,126.43 74.92,126.43 74.92,124.95 ; LCD2.20 v1(95.16,72.48) ; v1(95.5,68.14) 95.34,67.98 LCD2.11 91.6,67.98 89.9,66.28 89.59,66.28 v1(89.38,66.07) ; 121.92,46.23 121.92,47.62 122.05,47.75 ; 76.86,122.69 76.87,122.7 76.87,124.24 ; 78.84,124.26 78.84,122.74 ; 168,91.91 168.01,91.9 168.01,90.38 ; 105.41,124.46 106.68,124.46 ; 106.87,126.23 106.87,124.64 ; 161.98,89.68 161.98,88.13 162.04,88.07 ; v1(161.85,46.1) 161.93,46.02 161.93,44.32 ; 142.07,36.22 142.09,36.23 U6.9 ; v1(114.3,104.27) 114.69,103.87 U9.19 ; 130.05,47.75 130.05,47.41 130.03,47.4 130.03,44.08 130.3,43.81 ; v1(91.31,80.82) 91.47,80.98 LCD2.37 94.49,80.98 95.04,81.53 v1(95.04,81.74) ; 104.88,126.21 104.88,124.62 ; 94.9,124.33 94.63,124.33 94.48,124.49 ; 161.94,90.36 162,90.42 162,91.7 ; 103.25,124.46 104.39,124.46 ; 159.96,91.59 159.96,90.18 ; 94.9,126.33 94.9,121.82 v1(94.87,121.79) ; 165.96,91.85 165.94,91.83 165.94,90.4 ; 99.31,124.46 100.46,124.46 ; v1(149.61,102.74) 150.21,103.34 U52.1 ; 74.88,124.26 74.88,122.62 ; 101.02,122.25 100.86,122.41 100.86,126.16 ; 107.44,124.46 108.46,124.46 108.58,124.59 ; 95.38,124.46 96.77,124.46 ; 98.9,126.2 98.9,122.08 ; 121.92,45.59 121.92,44.2 ; 96.91,122.11 96.91,126.25 ; 92.87,122.56 92.87,126.31 ; 97.28,124.46 98.68,124.46 ; 120.27,74.93 121.79,74.93
  TOP w0.559: v1(27.18,31.11) 27.3,31.24 C9.2 29.08,31.24 v1(29.21,31.11) 29.92,31.83 C10.2 31.04,31.83 v1(31.75,31.11) ; C20.2 v1(157.62,31.51) ; MINIUSB1.8 100.37,3.04 ; MINIUSB1.8 98,3.04 ; MINIUSB1.8 99.18,1.56 ; MINIUSB1.8 99.18,4.53 ; COM0.5 83.09,11.55 ; COM0.5 84.34,10.29 ; COM0.5 83.09,9.03 ; COM0.5 81.83,10.29 ; v1(158.62,26.29) 159.11,25.8 C22.2 160.29,25.8 v1(161.16,26.67) ; 5.7,115.94 W1.1 ; W1.1 6.92,114.72 ; W1.1 6.92,117.16 ; W1.1 8.14,115.94 ; 123.07,111 H14.1 ; H14.1 126,113.93 ; H14.1 128.93,111 ; v1(43,69.76) 43.67,69.09 v1(76.2,69.09) ; USBH1.4 157.5,118.49 ; USBH1.4 156.25,117.23 ; USBH1.4 158.76,117.23 ; USBH1.4 157.5,115.98 ; H5.1 4,28.93 ; H5.1 4,23.07 ; H5.1 6.93,26 ; USBH1.6 154.43,122.29 ; USBH1.6 154.43,117.61 ; USBH1.6 156.77,119.95 ; R115.2 v1(134.75,104.27) ; C96.2 152.2,117.27 ; C96.2 v1(153.8,116.2) ; C96.2 152.2,115.14 ; v1(34.04,25.65) 33.27,25.65 32.74,26.18 U2.1 ; v1(53.59,82.8) 75.31,82.8 83.69,91.18 ; v1(112.57,77.67) 112.52,77.62 112.52,77.52 v1(110.58,75.57) 109.06,74.05 102.14,74.05 v1(102.11,74.08) ; 38.32,75.89 CON8.35 38.32,73.02 ; 79.98,38.53 BAT1.2 ; BAT1.2 77.52,40.21 ; BAT1.2 82.45,40.21 ; BAT1.2 79.98,41.88 ; v1(99.15,115.57) 100.55,114.17 C113.1 ; K1.2 5.03,100.43 ; K1.2 3.96,99.37 ; K1.2 3.96,101.5 ; K1.2 2.89,100.43 ; 14,33.07 H9.1 ; H9.1 16.93,36 ; H9.1 14,38.93 ; H9.1 11.07,36 ; v1(23.24,81.92) 22.72,82.43 CON8.4 ; 81.87,126.67 CON13.30 82.94,125.61 ; CON11.3 5.82,70.35 ; CON11.3 2.67,70.35 ; CON11.3 4.24,68.77 ; CON11.3 4.24,71.92 ; R142.1 128.18,100.71 v1(128.44,100.97) ; v1(113.79,63.28) 114.08,63.28 117.86,67.06 117.86,67.18 ; CAMERA.20 107.71,125.48 106.87,124.64 ; CAMERA.20 108.96,125.48 ; CAMERA.20 107.9,126.54 ; CN1.3 10.7,10.53 ; CN1.3 9.38,9.1 ; CN1.3 10.7,7.68 ; CN1.3 12.02,9.1 ; 111.55,10.11 USBH3.5 ; USBH3.5 113.89,7.77 ; USBH3.5 113.89,12.45 ; USBH3.5 116.22,10.11 ; 119.38,93.73 117.29,93.73 v1(117.25,93.77) 115.75,93.77 113.93,91.95 ; 119.38,93.73 120.4,94.74 126.11,94.74 131.67,100.3 v1(131.67,101.85) v1(131.67,104.09) v1(131.67,106.38) v1(131.67,108.2) v1(131.67,110.13) 131.67,111.35 134.37,114.05 v1(137.59,114.05) 142.88,114.05 v1(143.64,113.28) ; 119.38,93.73 119.99,93.73 v1(120.03,93.77) 119.99,93.77 ; CON8.M1 18.67,77.09 ; CON8.M1 18.67,73.03 ; CON8.M1 17.09,75.06 ; CON8.M1 20.26,75.06 ; v1(146.94,42.16) 146.56,41.78 C50.2 ; USBH2.4 137.17,117.23 ; USBH2.4 135.91,115.98 ; USBH2.4 135.91,118.49 ; USBH2.4 135.01,117.23 v1(132.38,114.6) 130.02,112.24 130.02,101.32 124.99,96.29 119.75,96.29 118.87,95.41 115.92,95.41 115.11,95.41 114.91,95.21 114.89,95.21 113.18,93.5 104.83,93.5 103.15,91.82 v1(90.14,91.82) 84.33,91.82 83.69,91.18 ; v1(113.54,74.42) 110.62,71.5 v1(110.59,71.5) 110.3,71.21 v1(107.06,71.21) ; C21.1 173.26,24.99 174.12,24.13 v1(174.18,24.13) ; v1(129.54,34.16) 129.54,35.04 129.93,35.43 ; v1(53.89,94.14) 55.22,94.14 C143.2 ; 83.69,91.18 76.33,91.18 v1(54.36,113.16) ; v1(84.84,86.36) 76.96,78.49 v1(50.55,78.49) ; v1(94.74,26.04) 95.25,26.54 Q2.E ; 50.48,19.94 CON4.4 50.48,16.41 ; v1(157.35,112.78) 156.72,112.14 R103.2 C161.1 ; 176.25,32 RST.2 177.32,30.94 ; v1(74.42,119) 74.42,114.17 83.82,104.78 v1(83.95,104.78) ; v1(110.78,79.47) 110.74,79.44 v1(108.74,77.43) 107.9,76.59 v1(101.47,76.59) ; R8.2 v1(156.72,23.56) ; Q3.E 20.58,48.13 v1(21.54,47.17) ; v1(107.19,63.28) 107.1,63.2 101.64,63.2 v1(101.55,63.28) ; 2.89,94.34 K2.2 ; K2.2 5.03,94.34 ; K2.2 3.96,95.4 ; K2.2 3.96,93.27 ; CON6.10 174.5,104.81 ; CON6.10 173.3,103.62 ; CON6.10 174.5,102.43 ; 35.92,75.89 CON8.29 35.92,73.02 ; DN2.1 v1(13.84,63.88) ; 10.88,12.1 CN1.2 ; CN1.2 12.2,10.68 ; CN1.2 12.2,13.53 ; CN1.2 13.52,12.1 ; v1(55.37,85.72) C150.2 v1(54.05,86.94) ; 15.57,91.62 C149.2 ; C149.2 16.64,92.68 ; C149.2 17.7,91.62 ; MINIUSB1.5 105.23,10.98 v1(105.66,11.4) ; MINIUSB1.5 105.92,9.09 ; MINIUSB1.5 105.23,7.61 ; v1(52.78,99.01) C151.2 v1(52.78,96.34) ; MINIUSB1.6 108.08,10.18 ; MINIUSB1.6 109.27,8.69 ; MINIUSB1.6 108.08,7.21 ; MINIUSB1.6 106.9,8.69 ; C147.1 138.56,106.43 138.3,106.68 v1(138.38,106.68) ; C8.2 13.25,27.18 ; C8.2 11.54,25.22 ; C8.2 9.84,27.18 ; C8.2 11.54,29.14 ; 100.2,18.29 C52.2 101.09,19.18 ; 14.23,16.33 CON5.3 ; CON5.3 14.23,18.72 ; CON5.3 15.42,17.53 ; U5.7 v1(91.31,48.39) ; C144.2 37.54,72.69 ; C144.2 37.54,70.56 ; C144.2 36.47,71.63 ; 103.07,26 H6.1 ; H6.1 108.93,26 ; H6.1 106,28.93 ; H6.1 106,23.07 ; LCD2.A 89.17,60.22 v1(88.65,59.69) ; CON3.4 61.31,19.94 ; CON3.4 61.31,16.41 ; CON3.4 60.05,18.18 ; H11.1 101.02,36 v1(97.03,32) 96.01,30.99 R16.1 ; H11.1 106,38.93 ; H11.1 108.93,36 ; H11.1 106,33.07 ; 99.18,7.21 MINIUSB1.7 ; MINIUSB1.7 99.18,10.18 ; MINIUSB1.7 100.37,8.69 ; MINIUSB1.7 98,8.69 ; 23.5,61.75 v1(23.5,63.63) ; 23.5,61.75 24.23,61.75 ; 23.5,61.75 23.5,60.36 ; 115.14,19.23 C97.2 ; C97.2 116.21,20.3 ; C97.2 117.27,19.23 ; C24.2 161.78,23 v1(162.69,22.1) ; 126,23.07 H12.1 ; H12.1 126,28.93 ; H12.1 123.07,26 ; 113.93,91.95 105.47,91.95 103.49,89.97 85.97,89.97 v1(85.47,89.47) 84.26,89.47 75.87,81.08 53.75,81.08 v1(53.72,81.05) ; 113.93,91.95 112.52,90.54 112.39,90.54 v1(112.27,90.42) 112.27,90.29 105.89,83.9 97.21,83.9 v1(95.04,81.74) ; 62.74,96.24 U17.1 ; U17.1 v1(64.01,97.66) ; U17.1 61.71,97.66 ; U17.1 v1(62.74,99.31) ; v1(17.4,58.67) 16.51,57.78 C7.2 ; 90.04,39.51 U5.1 ; U5.1 v1(90.04,43.05) ; U5.1 89.31,40.89 ; USBH1.5 169.92,119.95 ; USBH1.5 167.59,117.61 ; USBH1.5 167.59,122.29 ; USBH1.5 165.25,119.95 ; COM3.5 46.89,11.55 ; COM3.5 48.15,10.29 ; COM3.5 45.63,10.29 ; COM3.5 46.89,9.03 ; v1(111.35,99.97) 111.51,99.82 111.51,99.82 112.01,99.31 112.01,99.31 C106.1 ; 167.39,110.49 C64.2 168.28,111.38 ; CON6.14 175.69,98.54 ; CON6.14 173.3,98.54 ; CON6.14 174.5,97.35 ; C145.1 139.07,102.36 138.84,102.17 138.49,102.17 v1(138.3,101.98) ; 6.93,4 H1.1 4,6.93 ; LCD2.B 89.52,86.36 v1(88.39,86.36) ; C23.2 v1(171.69,22.37) ; K4.2 3.96,83.21 ; K4.2 2.89,82.15 ; K4.2 5.03,82.15 ; K4.2 3.96,81.08 ; CON8.18 v1(31.52,81.9) ; CON8.18 30.79,83.66 ; CON8.18 31.52,85.09 ; C68.2 v1(42.04,27.05) ; C68.2 42.04,29.21 ; C68.2 41.15,28.32 ; v1(134.87,110.49) 135.25,110.87 R110.1 ; 168.66,42.16 C17.2 167.77,41.27 ; v1(95.34,108.88) 103.12,108.88 H13.1 ; v1(107.06,66.18) v1(110.67,66.18) 112.65,66.18 v1(114.04,67.57) ; 176,123.07 H3.1 173.07,126 ; v1(51.56,85.6) 51.56,85.01 C148.2 v1(53.47,84.33) ; v1(155.32,48.51) 154.94,48.51 154.24,47.82 ; v1(83.66,23.02) v1(108.93,48.29) ; v1(149.48,41.91) 148.51,40.94 C54.2 ; v1(107.06,68.71) 103.64,68.71 103.09,69.26 102.49,69.26 v1(102.45,69.23) ; C19.2 v1(157.49,33.54) ; R3.1 175.26,28.81 174.65,29.42 v1(174.65,29.47) ; USBH3.4 123.97,14.09 ; USBH3.4 123.97,11.57 ; USBH3.4 125.23,12.83 ; USBH3.4 122.71,12.83 ; CON8.15 27.12,75.89 ; CON8.15 27.86,74.46 ; CON8.15 27.12,73.02 ; C49.1 v1(35.18,16.21) ; U5.3 v1(92.58,42.8) ; 6.93,126 H2.1 4,123.07 ; U5.2 v1(91.31,42.93) ; K3.2 5.03,88.24 ; K3.2 3.96,89.31 ; K3.2 2.89,88.24 ; K3.2 3.96,87.17 ; 72.13,16.35 CON2.6 ; CON2.6 72.13,20.01 ; CON2.6 70.95,18.18 ; v1(118.11,19.94) 118.11,19.94 118.11,18.7 ; C143.2 55.37,95.35 ; C143.2 54.31,94.28 ; C143.2 56.44,94.28 ; C143.2 54.41,95.25 v1(53.85,95.25) ; C162.2 138.94,108.08 v1(138.81,108.2) ; v1(103.25,58.29) 104.78,59.82 v1(116.59,59.82) ; v1(111.58,102.64) 111.94,102.64 113.56,104.27 v1(114.3,104.27) ; C11.2 36.3,30.56 ; C11.2 37.19,29.67 ; C11.2 36.3,29.18 35.41,28.3 v1(35.41,27.86) 35.43,27.89 C40.1 ; DN4.1 v1(13.84,67.82) ; 16.77,16.33 CON5.2 ; CON5.2 16.77,18.72 ; CON5.2 15.57,17.53 ; v1(45.72,75.56) 46.23,75.06 CON8.M2 49.66,75.06 v1(50.16,75.56) ; 174.5,102.27 CON6.12 173.3,101.08 ; CON8.40 v1(40.32,85.41) ; v1(138.34,103.89) 138.3,103.89 138.81,104.39 C153.1 ; v1(173.74,39.12) 173.74,38.1 C16.2 ; CON8.26 v1(34.72,81.9) ; U2.1 32.74,27.16 33.15,27.56 v1(34.04,27.56) ; U2.1 v1(34.04,26.62) ; 93.09,124.71 92.68,124.71 92.46,124.49 ; v1(129.16,104.39) L9.2 v1(129.16,102.23) ; 86.96,16.41 CON1.4 ; CON1.4 85.7,18.18 ; CON1.4 86.96,19.94 ; R111.2 v1(157.48,113.79) ; v1(43.18,25.4) 44.25,24.33 U8.15 ; C12.2 v1(177.93,35.31) ; 132.84,117.61 USBH2.6 ; USBH2.6 130.5,119.95 ; USBH2.6 132.84,122.29 ; USBH2.6 135.18,119.95 ; 14.62,63.35 R22.1 ; R22.1 15.49,62.45 ; R22.1 v1(16.61,63.35) ; 151.1,102.73 U52.1 152.43,103.34 ; D6.1 25.57,16.05 26.42,16.89 v1(26.42,17.91) ; D6.1 24.51,15.16 23.22,13.87 ; D6.1 23.45,16.05 22.86,16.64 v1(22.86,17.91) ; D6.1 v1(24.51,17.91) ; 11.07,106 H10.1 ; H10.1 14,103.07 ; H10.1 14,108.93 ; H10.1 16.93,106 ; H7.1 1.78,108.22 v1(1.78,108.46) 1.78,108.78 H8.1 ; H7.1 4,103.07 ; H7.1 6.93,106 ; C16.2 173.86,38.86 ; C16.2 172.97,37.97 ; R109.1 v1(134.75,112.9) ; CON8.37 39.12,75.94 ; CON8.9 v1(24.72,72.18) ; 127.04,7.77 USBH3.6 ; USBH3.6 129.38,10.11 ; USBH3.6 124.71,10.11 ; USBH3.6 127.04,12.45 ; 100.76,22.15 C51.2 101.83,21.08 ; C25.2 170.16,25.54 v1(169.57,26.14) ; 173.07,4 H4.1 176,6.93 ; 35.12,73.02 CON8.27 35.12,75.89 ; v1(33.98,49.79) 33.37,49.79 31.77,48.18 29.08,48.18 ; C15.2 v1(157.61,37.59) ; C15.2 158.95,38.66 ; C15.2 158.95,36.53 ; C35.2 v1(126.62,20.07) ; C146.1 156.21,108.46 v1(155.83,108.08) ; H8.1 4,113.93 ; H8.1 6.93,111 ; v1(24.38,78.61) v1(42.67,78.61) ; CON8.34 v1(37.92,85.41) ; 143.66,119.95 USBH2.5 ; USBH2.5 148.33,119.95 ; USBH2.5 146,122.29 ; v1(108.58,110.52) 107.95,111.15 C105.1 R139.1 ; v1(128.78,35.43) 129.93,35.43 ; 129.93,35.43 R63.1 130.02,35.59 v1(129.03,36.58) ; C142.2 v1(157.35,105.66) ; v1(22.65,3.64) 22.53,3.76 LED_3.3.2 ; 56.26,114.98 v1(56.26,118.11) ; 164.41,110.95 C73.2 165.48,109.88 ; 41.52,75.89 CON8.43 41.52,73.02 ; 32.72,73.02 CON8.21 32.72,75.89 ; 106.9,3.04 MINIUSB1.9 ; MINIUSB1.9 109.27,3.04 ; MINIUSB1.9 108.08,4.53 ; MINIUSB1.9 108.08,1.56 ; R30.2 v1(22.61,49.66) ; v1(130.05,93.93) v1(130.05,91.69) ; 93.85,40.89 v1(93.85,42.8) ; C18.2 v1(157.48,35.31) ; v1(64.26,113.16) 64.26,113.03 v1(81.37,95.92) v1(83.95,95.92) v1(90.7,95.92) 94.9,95.92 ; TINYBOARD.A2 116.89,89 112.55,84.66 112.55,84.48 110.59,82.52 110.42,82.52 ; C26.2 163.18,25.74 v1(163.55,26.11) ; v1(89.89,77.14) v1(87.38,77.14) ; C137.2 v1(157.48,104.01) ; 129.67,42.93 131.06,42.93
  BOTTOM w0.203: 169.93,46.48 169.93,47.78 ; 136.02,90.55 136.02,91.44 ; 148,91.69 147.81,91.87 v1(146.02,91.87) v1(144.03,91.87) 142.92,91.87 142.58,92.21 ; 148,91.69 148,90.47 ; 148,91.69 148.29,91.98 149.57,91.98 ; 131.95,89.41 131.95,88.27 ; v1(161.85,46.1) 162,46.25 162,47.47 ; 172.09,46.48 172.09,47.5 171.96,47.62 ; v1(125.98,46.35) 125.98,47.85 126.06,47.93 ; 165.99,46.48 165.99,47.5 ; 171.96,45.47 171.96,44.45 ; 130,48.09 129.9,47.99 129.9,47.4 129.91,47.38 129.91,46.62 129.9,46.6 v1(129.9,46.15) ; 149.99,46.35 149.99,44.2 ; 160.02,45.59 160.02,44.45 ; 137.97,46.51 137.97,47.55 ; 138,45.49 138,44.45 ; 136.02,89.41 136.02,88.52 ; 160.02,46.35 160.02,47.5 ; 133.99,89.41 133.99,88.14 ; 118.29,45.9 119.58,45.9 ; v1(127.91,46.13) 127.91,46.61 127.91,46.62 127.91,47.38 127.91,47.39 127.91,48.03 127.97,48.09 ; 163.96,87.76 163.96,89.66
  BOTTOM w0.254: 119.99,71.01 120.01,70.99 121.87,70.99 ; 176.05,47.73 176.05,44.22 ; v1(125.98,46.35) 125.6,45.97 ; 156.01,49.61 156.01,46.1 ; 122.22,68.99 v1(122.73,68.99) ; 120.52,74.93 121.79,74.93 ; 118.49,75.06 119.63,75.06
  BOTTOM w0.279: 130,48.09 130,46.25 v1(129.9,46.15) ; 132.33,43.97 132.08,44.22 v1(132.08,45.97) 132.08,47.9 131.89,48.09 ; 126.14,48.01 126.06,47.93 126.06,46.58 126.14,46.51 v1(125.98,46.35) ; 176.4,46 170.69,46 ; v1(123.8,46.13) 124.03,46.35 124.03,47.93 ; 127.97,48.09 127.97,46.19 v1(127.91,46.13)
  BOTTOM w0.305: 120.02,68.99 118.52,68.99 v1(117.78,69.72) ; 120.02,68.99 122.22,68.99 ; 120.02,68.99 119.99,69.01 119.99,71.01 TINYBOARD.C20 ; v1(123.95,91.82) 123.85,91.82 123.63,92.04 122.64,92.04 122.05,91.44 121.45,92.04 121.15,92.04 ; v1(123.95,91.82) 123.95,90.55 ; v1(123.95,91.82) 124.17,92.04 125.73,92.04 125.98,91.78 v1(125.98,91.69) ; 70.86,126.33 70.86,124.91 ; 46.99,53.57 46.82,53.4 LCD1.37 ; 46.99,53.57 v1(46.99,53.75) ; 46.99,53.57 47.32,53.24 LCD1.38 ; 48.01,53.7 48.32,53.38 LCD1.40 ; 48.01,53.7 v1(48.01,53.77) ; 48.01,53.7 48.01,53.44 47.82,53.25 LCD1.39 ; LCD3.37 46.82,65.88 46.99,65.71 v1(46.99,65.53) ; v1(130.18,87.38) 130.05,87.5 130.05,89.53 ; v1(128.02,91.69) 127.67,92.04 126.33,92.04 v1(125.98,91.69) ; v1(128.02,91.69) 128.02,90.3 ; v1(128.02,91.69) 128.24,91.91 129.83,91.91 v1(130.05,91.69) ; 60.87,126.35 60.87,124.92 ; v1(126.24,87.76) 125.98,88.01 125.98,89.66 ; 149.99,47.88 149.99,46.35 ; LCD1.29 42.82,53.61 42.82,53.62 v1(42.82,53.75) ; LCD1.20 v1(38.32,53.75) ; 120.41,81 121.86,81 121.87,81.01 ; 134.01,90.5 134.01,91.92 133.96,91.97 ; 130.05,90.42 v1(130.05,91.69) ; v1(130.05,91.69) 130.33,91.97 132.05,91.97 ; 121.15,92.04 121.14,92.05 120.85,92.05 ; 121.15,92.04 121.27,91.91 121.38,91.91 121.92,91.37 121.92,90.17 ; 132.05,91.97 132.05,90.45 ; 132.05,91.97 133.96,91.97 ; 147.96,45.85 v1(147.96,44.2) ; v1(125.98,91.69) 125.98,90.3 ; 54.9,126.32 54.9,124.89 54.93,124.87 ; 154.05,46.23 154.05,47.88 ; 136.02,91.44 136.02,91.74 135.79,91.97 133.96,91.97 ; v1(33.82,69.47) LCD3.11 v1(33.82,65.69) ; 120.01,80.69 120.01,79.42 119.98,79.39 ; 56.86,126.33 56.86,124.9 ; 152.02,45.72 152.02,44.2 ; 118.2,80.97 118.24,81.01 119.64,81.01 ; LCD1.45 50.82,52.85 51.18,53.21 v1(51.18,53.75) ; 72.57,124.57 55.17,124.57 ; 119.67,79.03 118.12,79.03 118.1,79.01 ; v1(128.16,87.89) 128.02,88.04 128.02,89.53 ; 173.99,47.75 173.99,46.23 ; 64.86,126.26 64.86,124.83 ; 118.33,77.03 118.38,77.08 119.53,77.08 ; 120.5,76.94 121.81,76.94 121.83,76.96 ; 120.03,81.28 120.03,82.85 120.09,82.91 ; v1(37.97,69.47) 38.32,69.13 LCD3.20 v1(38.32,65.55) ; 68.87,126.39 68.87,124.96 ; LCD1.11 33.81,49.95 v1(33.98,49.79) ; 58.83,126.34 58.83,124.91 ; 120.53,79.02 121.74,79.02 ; 120.06,90.09 119.89,89.92 ; 152.02,46.23 152.02,47.75 ; v1(137.92,90.17) 137.92,88.01 ; v1(43,69.76) 42.82,69.57 LCD3.29 42.82,65.55 v1(42.8,65.53) ; 153.92,45.59 153.92,44.07 ; 66.85,126.34 66.85,124.92 ; 173.99,45.59 173.99,44.2 ; 147.96,47.88 147.96,46.23 ; 149.99,44.2 v1(149.99,44.07) ; 171.96,89.66 171.96,88.14 ; 171.96,90.3 v1(171.96,92.08) ; 72.82,126.33 72.82,124.91 ; 62.86,126.35 62.86,124.92
  BOTTOM w0.559: COM0.5 84.34,10.29 ; COM0.5 83.09,9.03 ; COM0.5 81.83,10.29 ; 152.09,119.95 USBH1.6 ; USBH1.6 156.77,119.95 ; USBH1.6 154.43,117.61 ; W1.1 6.92,117.16 ; W1.1 5.7,115.94 ; W1.1 6.92,114.72 ; W1.1 8.14,115.94 ; USBH2.4 135.91,118.49 ; USBH2.4 135.91,115.98 ; USBH2.4 137.17,117.23 ; USBH2.4 134.66,117.23 ; 85.7,18.18 CON1.4 ; CON1.4 86.96,19.94 ; CON1.4 86.96,16.41 ; CON6.12 174.5,102.27 ; CON6.12 174.5,99.89 ; CON6.12 173.3,101.08 ; CON6.12 175.69,101.08 ; K3.2 5.03,88.24 ; K3.2 3.96,87.17 ; K3.2 2.89,88.24 ; K3.2 3.96,89.31 ; CN1.2 13.52,12.1 ; CN1.2 12.2,10.68 ; CN1.2 12.2,13.53 ; CN1.2 10.88,12.1 ; v1(99.19,79.44) 101.47,77.15 v1(101.47,76.59) ; 123.97,11.57 USBH3.4 ; USBH3.4 122.71,12.83 ; USBH3.4 125.23,12.83 ; USBH3.4 123.97,14.09 ; C79.2 32.89,92.46 ; C79.2 31.11,92.46 ; C79.2 v1(32,91.06) ; 15.57,17.53 CON5.2 ; CON5.2 17.96,17.53 ; CON5.2 16.77,18.72 ; CON5.2 16.77,16.33 ; 4,113.93 H8.1 6.93,111 ; COM3.5 46.89,11.55 ; COM3.5 48.15,10.29 ; COM3.5 45.63,10.29 ; COM3.5 46.89,9.03 ; 113.89,7.77 USBH3.5 ; USBH3.5 113.89,12.45 ; USBH3.5 116.22,10.11 ; USBH3.5 111.55,10.11 ; USBH1.4 157.5,118.49 ; USBH1.4 157.5,115.98 ; USBH1.4 158.76,117.23 ; USBH1.4 156.25,117.23 ; 13.03,17.53 CON5.3 ; CON5.3 14.23,16.33 ; CON5.3 14.23,18.72 ; CON5.3 15.42,17.53 ; 169.93,46.48 170.41,46 170.69,46 ; 173.07,4 H4.1 176,6.93 ; LCD1.A 28.01,48.72 ; LCD1.A 26.05,50.43 ; LCD1.A 26.05,47.02 ; LCD1.A 24.1,48.72 ; 2.67,70.35 CON11.3 ; CON11.3 4.24,68.77 ; CON11.3 5.82,70.35 ; CON11.3 4.24,71.92 ; H9.1 16.93,36 ; H9.1 14,33.07 ; H9.1 14,38.93 ; H9.1 11.07,36 ; v1(24.38,78.61) 24.72,78.27 v1(24.72,72.18) ; K2.2 3.96,95.4 ; K2.2 3.96,93.27 ; K2.2 2.89,94.34 ; K2.2 5.03,94.34 ; C78.2 v1(35.94,91.06) ; C78.2 36.83,92.46 ; C78.2 35.05,92.46 ; 176.25,29.87 RST.2 ; RST.2 177.32,30.94 ; RST.2 176.25,32 ; RST.2 175.19,30.94 ; 4,123.07 H2.1 6.93,126 ; 61.31,16.41 CON3.4 ; CON3.4 60.05,18.18 ; CON3.4 61.31,19.94 ; USBH2.6 135.18,119.95 ; USBH2.6 132.84,117.61 ; USBH2.6 130.5,119.95 ; v1(50.55,78.49) 50.55,75.95 v1(50.16,75.56) ; CON6.14 175.69,98.54 ; CON6.14 174.5,99.73 ; CON6.14 174.5,97.35 ; CON6.14 173.3,98.54 ; 6.93,106 H7.1 4,103.07 ; v1(81.37,95.92) 81.37,95.85 79.93,94.41 v1(79.12,94.41) ; 3.96,81.08 K4.2 ; K4.2 2.89,82.15 ; K4.2 5.03,82.15 ; K4.2 3.96,83.21 ; 111.86,58.58 116.84,53.59 v1(116.97,53.59) ; 111.86,58.58 v1(111.89,58.58) ; 111.86,58.58 v1(109.73,60.71) 107.19,63.25 v1(107.19,63.28) 107.06,63.41 v1(107.06,66.18) ; 49.22,18.18 CON4.4 ; CON4.4 50.48,19.94 ; CON4.4 50.48,16.41 ; CON10.13 172.53,82.47 ; CON10.13 170.98,84.02 ; CON10.13 170.98,80.92 ; 126,28.93 H12.1 126,23.07 ; LCD3.B 53.03,64.94 ; LCD3.B 51.07,66.64 ; LCD3.B 51.07,63.24 ; 14,103.07 H10.1 14,108.93 ; K1.2 3.96,101.5 ; K1.2 3.96,99.37 ; K1.2 2.89,100.43 ; K1.2 5.03,100.43 ; P2.4 30.47,115.69 ; P2.4 29.47,114.24 ; P2.4 28.46,115.69 ; v1(142.58,67.18) 143.35,67.94 C62.1 ; 148.78,72.99 CON10.6 ; CON10.6 147.46,73.89 ; CON10.6 148.78,74.79 ; CON10.6 v1(150.44,73.89) ; C77.2 v1(33.91,91.06) ; C77.2 33.02,92.46 ; C77.2 34.8,92.46 ; 124.71,10.11 USBH3.6 ; USBH3.6 129.38,10.11 ; USBH3.6 127.04,7.77 ; USBH3.6 127.04,12.45 ; H14.1 126,113.93 ; H14.1 128.93,111 ; H14.1 123.07,111 ; 173.07,126 H3.1 176,123.07 ; 168.22,53.27 CON10.12 ; CON10.12 169.77,51.72 ; CON10.12 171.32,53.27 ; CON10.12 169.77,54.81 ; 126.14,48.01 126.46,48.01 126.55,48.09 131.89,48.09 133.86,50.06 v1(133.86,50.72) ; CON6.10 174.5,104.81 ; CON6.10 173.3,103.62 ; CON6.10 175.69,103.62 ; CON6.10 174.5,102.43 ; LCD1.B 53.57,50.44 ; LCD1.B 51.62,48.74 ; LCD1.B 55.53,48.74 ; LCD1.B 53.57,47.04 ; v1(94.87,121.79) 92.96,119.89 92.96,112.9 87.5,107.44 87.5,93.18 92.35,88.34 96.11,88.34 96.11,88.34 97.84,88.34 v1(100.14,86.04) 102.13,84.05 102.13,84.05 v1(102.21,83.97) v1(106.71,79.48) 110.58,75.61 v1(110.58,75.57) 110.59,75.56 v1(110.59,71.5) v1(110.59,68.68) 110.59,66.48 v1(113.79,63.28) 116.59,60.49 v1(116.59,59.82) ; v1(113.54,74.42) 113.54,68.07 v1(114.04,67.57) 114.09,67.57 v1(116.26,65.41) 117.86,63.8 v1(117.86,63.75) ; H5.1 6.93,26 ; H5.1 4,28.93 ; H5.1 4,23.07 ; v1(112.57,77.67) 112.52,77.72 112.52,77.72 v1(110.78,79.47) 110.65,79.47 104.22,85.9 v1(104.22,86.03) 104.09,86.03 99.06,91.06 97.28,91.06 97.28,91.06 95.63,91.06 94.92,91.77 v1(94.82,91.77) 94.82,91.87 90.22,96.47 90.22,103.76 v1(95.34,108.88) 99.19,112.73 99.19,115.42 99.15,115.46 v1(99.15,115.57) v1(99.15,121.54) ; 82.94,125.61 CON13.30 81.87,126.67 ; v1(88.39,86.36) 88.39,86.55 v1(85.47,89.47) 85.47,89.53 83.95,91.06 v1(83.95,95.92) v1(83.95,104.78) 83.95,111.12 88.01,115.19 88.01,123.83 v1(88.9,124.71) ; 52.67,124.68 53.6,125.61 CON13.2 ; 103.07,26 H6.1 ; H6.1 106,23.07 ; H6.1 106,28.93 ; H6.1 108.93,26 ; 140.34,93.93 140.72,93.55 v1(140.72,93.47) 140.26,93.93 v1(130.05,93.93) 124.19,93.93 123.74,94.37 120.63,94.37 v1(120.03,93.77) ; 29.21,92.46 C76.2 ; C76.2 30.99,92.46 ; C76.2 v1(30.1,91.06) ; 119.89,89.92 119,89.03 TINYBOARD.A2 118.77,89 117.98,89.79 ; v1(107.06,68.71) v1(107.06,71.21) ; H11.1 108.93,36 ; H11.1 103.07,36 ; H11.1 106,33.07 ; 24.1,64.93 LCD3.A ; LCD3.A 26.05,66.63 ; LCD3.A 26.05,63.23 ; LCD3.A 28.01,64.93 ; 9.38,9.1 CN1.3 ; CN1.3 10.7,7.68 ; CN1.3 10.7,10.53 ; CN1.3 12.02,9.1 ; 22.05,15.85 24,15.85 24,14.63 23.65,14.27 ; 117.65,72.57 118.22,72 TINYBOARD.C20 119.01,72 119.76,71.25 ; 167.59,117.61 USBH1.5 ; USBH1.5 169.92,119.95 ; USBH1.5 165.25,119.95 ; 108.96,125.48 CAMERA.20 107.9,126.54 ; v1(142.7,70.99) C67.2 142.62,69.6 v1(141.6,68.58) ; 148.33,119.95 USBH2.5 146,117.61 ; 4,6.93 H1.1 6.93,4 ; 72.13,16.35 CON2.6 70.95,18.18 ; CON10.3 v1(150.44,67.24)
  vias: v1(1.52,76.83) v1(1.78,85.09) v1(2.03,90.55) v1(2.03,73.79) v1(2.03,68.07) v1(2.03,62.99) v1(2.03,54.74) v1(2.03,46.48) v1(2.67,36.96) v1(2.67,31.88) v1(2.92,16.64) v1(4.06,75.95) v1(5.84,118.87) v1(5.9,97.33) v1(6.6,86.89) v1(6.6,85.57) v1(6.86,7.62) v1(7.11,36.96) v1(7.11,31.88) v1(7.17,98.95) v1(7.75,20.19) v1(8.26,88.52) v1(8.26,87) v1(8.26,85.57) v1(8.38,122.68) v1(8.38,73.79) v1(8.38,68.07) v1(8.38,62.99) v1(8.38,54.74) v1(8.38,46.48) v1(8.76,11.68) v1(9.27,83.19) v1(10.29,118.87) v1(10.64,29.74) v1(10.69,24.74) v1(12.06,43.84) v1(12.42,99.23) v1(12.37,24.79) v1(12.52,29.79) v1(12.83,125.22) v1(12.83,122.68) v1(13.49,40.64) v1(13.72,26.42) v1(13.82,27.84) v1(13.97,8.13) v1(14.35,19.71) v1(14.48,84.98) v1(15.1,101.55) v1(16.64,115.06) v1(16.64,108.71) v1(16.89,47.75) v1(17.27,125.22) v1(17.27,71.88) v1(17.27,68.07) v1(17.27,8.13) v1(17.6,87.74) v1(17.75,19.99) v1(18.25,45.77) v1(18.16,35.23) v1(18.41,61.34) v1(18.41,54.74) v1(18.54,24.64) v1(18.66,80.6) v1(20.14,87.74) v1(20.12,43.31) v1(20.33,85.19) v1(20.8,29.84) v1(21.46,13.08) v1(21.72,71.88) v1(21.72,68.07) v1(21.84,45.21) v1(22.24,78.22) v1(22.35,115.06) v1(22.35,108.71) v1(22.35,97.28) v1(22.35,91.57) v1(23.37,25.4) v1(23.37,22.86) v1(24.38,38.56) v1(25.53,128.4) v1(25.53,124.59) v1(25.53,6.48) v1(25.58,94.32) v1(26.16,71.88) v1(27.43,115.06) v1(27.43,108.71) v1(27.43,102.36) v1(27.92,96.79) v1(28.07,118.87) v1(28.07,44.58) v1(28.07,39.5) v1(28.96,49.5) v1(28.96,13.97) v1(29.77,46.05) v1(29.97,128.4) v1(29.97,124.59) v1(30.61,71.88) v1(32.51,13.84) v1(33.78,6.48) v1(34.42,118.87) v1(34.42,108.71) v1(34.42,102.36) v1(34.42,44.58) v1(34.42,39.5) v1(35.05,21.08) v1(35.05,14.73) v1(35.69,128.4) v1(35.69,124.59) v1(37.33,49.91) v1(37.57,31.22) v1(37.74,25.52) v1(37.82,19.52) v1(37.92,22.03) v1(38.86,4.57) v1(39.98,13.36) v1(40.13,128.4) v1(40.13,124.59) v1(40.13,28.07) v1(40.38,82.09) v1(40.77,118.87) v1(40.77,115.06) v1(40.77,109.35) v1(40.77,97.92) v1(40.77,91.57) v1(40.77,44.58) v1(40.77,39.5) v1(42.46,21.74) v1(42.66,49.91) v1(42.82,62.94) v1(42.82,60.39) v1(42.82,57.15) v1(43.05,46.3) v1(43.31,18.29) v1(43.55,85.45) v1(43.94,15.37) v1(45.21,4.57) v1(46.48,28.07) v1(46.8,83.26) v1(47.12,118.87) v1(47.12,115.06) v1(47.12,109.35) v1(47.12,97.92) v1(47.12,91.57) v1(47.12,44.58) v1(47.12,39.5) v1(47.37,15.24) v1(47.5,46.3) v1(47.62,49.78) v1(48.13,57.53) v1(48.16,56.32) v1(49.73,31.19) v1(49.76,62.94) v1(49.78,60.43) v1(50,88.57) v1(50.29,15.24) v1(50.67,21.46) v1(52.83,105.54) v1(52.83,101.09) v1(52.96,31.19) v1(53.24,71.61) v1(53.34,25.4) v1(53.47,44.58) v1(53.47,39.5) v1(53.62,65.53) v1(54.74,128.4) v1(54.74,50.8) v1(54.99,56.32) v1(54.99,53.77) v1(55.37,62.94) v1(57.02,55.75) v1(57.28,84.58) v1(57.35,22.2) v1(57.61,50.5) v1(57.61,45.62) v1(57.78,60.43) v1(57.94,62.94) v1(58.8,118.75) v1(59.13,65.53) v1(59.05,17.02) v1(59.18,128.4) v1(59.18,101.09) v1(59.18,11.56) v1(59.18,6.48) v1(59.44,27.69) v1(59.44,25.78) v1(60.07,31.11) v1(60.3,22.4) v1(60.43,118.87) v1(60.54,50.14) v1(60.71,60.35) v1(60.83,56.32) v1(60.83,53.75) v1(61.04,37.36) v1(61.09,113.67) v1(61.09,62.94) v1(61.14,45.87) v1(61.72,84.58) v1(61.85,118.87) v1(61.85,50.16) v1(61.98,68.94) v1(62.28,65.53) v1(63.27,118.87) v1(63.37,27.69) v1(63.37,25.78) v1(63.75,56.01) v1(64.26,128.4) v1(64.52,71.75) v1(64.72,34.65) v1(64.9,118.75) v1(65.53,23.06) v1(65.68,113.81) v1(65.91,16.13) v1(66.17,90.3) v1(66.17,84.58) v1(66.24,81.05) v1(66.24,78.46) v1(66.19,68.91) v1(66.32,118.75) v1(66.27,82.91) v1(66.42,75.79) v1(67.28,113.67) v1(67.94,118.75) v1(68.33,56.32) v1(68.45,53.75) v1(68.45,50.8) v1(68.58,62.94) v1(68.71,128.4) v1(68.71,113.79) v1(68.66,81.05) v1(68.68,78.46) v1(68.66,71.65) v1(68.71,27.69) v1(68.71,25.78) v1(68.78,82.96) v1(68.78,16.23) v1(68.88,19.15) v1(68.96,60.43) v1(69.12,75.88) v1(69.47,118.75) v1(69.98,11.56) v1(69.98,6.48) v1(70.23,113.79) v1(70.23,34.82) v1(70.61,90.3) v1(70.61,84.58) v1(70.74,50.55) v1(70.99,56.13) v1(71.07,118.87) v1(71.63,113.79) v1(72.9,118.87) v1(73.41,56.26) v1(74.04,50.42) v1(74.3,62.94) v1(74.42,128.4) v1(74.55,27.81) v1(74.55,25.91) v1(75.13,32.59) v1(75.18,60.43) v1(75.95,22.1) v1(76.1,55.35) v1(76.12,16.1) v1(76.33,118.24) v1(76.33,113.79) v1(76.32,71.61) v1(76.71,50.55) v1(76.96,20.19) v1(78.87,128.4) v1(78.87,14.05) v1(79.14,49.26) v1(79.12,20.19) v1(79.5,116.33) v1(79.5,111.89) v1(80.01,57.28) v1(80.01,42.85) v1(80.87,63.66) v1(80.9,27.81) v1(80.9,25.91) v1(81.28,20.19) v1(81.49,60.75) v1(82.02,45.39) v1(81.97,14) v1(82.65,33.2) v1(82.8,20.32) v1(83.95,117.6) v1(83.95,113.16) v1(84.2,81.68) v1(84.3,28.27) v1(84.66,16.51) v1(84.85,54.97) v1(84.99,42.8) v1(85.22,7.11) v1(85.47,51.44) v1(85.85,120.14) v1(85.85,115.7) v1(86.13,25.58) v1(86.49,127.13) v1(86.49,122.68) v1(86.68,73.07) v1(86.87,22.81) v1(86.87,20.32) v1(87.15,45.14) v1(87.98,70.77) v1(88.04,31.85) v1(88.65,12.45) v1(88.9,23.24) v1(89.18,28.63) v1(89.55,68.8) v1(90.02,25.81) v1(91.14,14.48) v1(91.24,89.99) v1(91.82,49.5) v1(92,31.5) v1(92.46,60.71) v1(92.64,44.93) v1(92.71,26.54) v1(92.71,23.37) v1(93.01,29.03) v1(93.75,61.95) v1(94.11,10.92) v1(94.11,5.21) v1(94.61,43.84) v1(94.67,38.53) v1(94.91,50.05) v1(95.25,23.37) v1(95.25,16.89) v1(95.38,48.36) v1(95.48,61.29) v1(96.9,63.65) v1(97.31,46.15) v1(97.54,23.37) v1(98.02,101.12) v1(98.37,98.15) v1(98.42,61.01) v1(98.47,67.87) v1(98.55,42.52) v1(98.76,38.18) v1(99.44,28.45) v1(99.72,98.45) v1(99.69,45.31) v1(99.69,17.4) v1(99.94,63.02) v1(100.28,89.99) v1(100.51,46.56) v1(100.51,33.17) v1(100.63,23.27) v1(100.68,72.31) v1(101.65,45.54) v1(101.73,24.26) v1(101.73,2.67) v1(101.98,17.4) v1(101.98,12.32) v1(102.08,36.55) v1(102.33,50.26) v1(103.45,74.09) v1(103.63,20.19) v1(103.63,5.84) v1(103.84,43.26) v1(104.22,55.85) v1(104.29,50.84) v1(104.34,16.66) v1(105.54,2.67) v1(106.73,74.07) v1(107.44,19.94) v1(107.65,98.16) v1(108.23,49.76) v1(109.22,32.64) v1(109.98,5.84) v1(110.95,10.13) v1(111.25,27.94) v1(111.25,2.67) v1(111.35,108.81) v1(111.43,91.11) v1(111.92,29.8) v1(111.89,14.73) v1(112.24,84.23) v1(112.27,24.38) v1(112.67,50.11) v1(112.85,51.59) v1(113.56,70.82) v1(113.74,105.82) v1(113.79,20.45) v1(114.62,48.53) v1(114.83,53.64) v1(115.06,6.48) v1(115.19,27.81) v1(115.32,32.38) v1(115.44,36.83) v1(115.7,44.96) v1(115.7,2.67) v1(116.08,50.55) v1(116.2,20.95) v1(117.07,104.47) v1(117.6,46.03) v1(117.6,44.83) v1(118.24,49.78) v1(118.72,102.62) v1(118.66,24.17) v1(118.87,36.96) v1(118.87,14.73) v1(119.13,27.81) v1(119.25,32.38) v1(119.58,48.31) v1(120.78,10.29) v1(120.78,6.48) v1(120.78,2.67) v1(122.43,77.85) v1(122.68,19.94) v1(122.68,15.37) v1(123.32,66.67) v1(123.49,60.27) v1(123.57,63.37) v1(123.7,54.99) v1(123.83,79.76) v1(123.83,58.55) v1(124.41,68.81) v1(124.49,51.99) v1(124.46,16.64) v1(124.59,94.21) v1(124.69,73.3) v1(124.84,34.92) v1(126.21,13.64) v1(126.49,81.92) v1(126.49,6.48) v1(126.49,2.67) v1(126.9,74.04) v1(126.93,70.24) v1(127.13,29.34) v1(127.13,22.35) v1(127.51,58.8) v1(127.64,54.99) v1(128.35,64.67) v1(128.4,81.76) v1(128.47,51.29) v1(128.98,107.9) v1(129.29,17.53) v1(129.49,71.98) v1(129.57,105.84) v1(129.57,52.15) v1(130.43,76.2) v1(130.51,113.08) v1(130.56,54.31) v1(130.84,98.02) v1(131.06,58.42) v1(131.95,67.69) v1(131.95,61.11) v1(132.46,51.21) v1(132.53,39) v1(133.22,112.8) v1(133.32,98.07) v1(133.86,86.74) v1(133.86,69.85) v1(133.86,65.41) v1(133.86,59.56) v1(133.86,55.12) v1(133.99,43.94) v1(134.26,74.17) v1(134.75,80.14) v1(136.98,80.42) v1(137.08,51.03) v1(137.59,43.99) v1(138.05,45.97) v1(138.18,59.56) v1(138.3,69.85) v1(138.3,65.41) v1(138.3,55.12) v1(138.35,72.75) v1(138.56,115.82) v1(139.12,54.25) v1(139.32,35.43) v1(139.32,33.02) v1(139.4,51.03) v1(139.57,98.01) v1(139.6,58.29) v1(139.9,121.01) v1(140.28,44.02) v1(140.46,128.4) v1(140.46,124.46) v1(140.56,80.52) v1(140.72,111.89) v1(140.84,115.95) v1(141,59.56) v1(141.08,54.89) v1(141.07,51) v1(141.35,86.61) v1(141.48,33.15) v1(142.14,76.43) v1(142.47,43.94) v1(142.62,110.87) v1(142.62,109.35) v1(142.7,86.21) v1(143.79,105.61) v1(143.76,94.74) v1(144.42,116.05) v1(144.63,78.99) v1(145.54,128.4) v1(145.54,124.46) v1(145.87,86.31) v1(145.92,80.52) v1(146.05,115.57) v1(146.05,61.59) v1(146.18,65.15) v1(146.18,58.17) v1(146.56,67.31) v1(146.66,76.55) v1(147.19,102.87) v1(147.19,87.63) v1(147.35,51.02) v1(147.37,96.85) v1(147.57,79.35) v1(147.71,60.42) v1(148.08,113.16) v1(148.23,110.29) v1(148.77,117.4) v1(149.28,79.65) v1(149.45,120.42) v1(149.48,104.01) v1(149.63,51.05) v1(149.73,86.61) v1(149.66,54.36) v1(149.99,128.4) v1(149.99,124.46) v1(149.99,96.7) v1(150.37,88.01) v1(150.62,17.27) v1(150.62,7.75) v1(151.64,1.91) v1(151.89,20.45) v1(152.04,51) v1(152.2,54.31) v1(152.27,41.78) v1(152.4,112.65) v1(152.65,87.38) v1(152.86,96.62) v1(152.91,43.56) v1(153.03,37.85) v1(153.29,101.98) v1(153.39,105.79) v1(153.54,33.15) v1(153.75,13.56) v1(153.8,86.23) v1(153.8,79.5) v1(153.8,75.06) v1(153.8,70.61) v1(153.8,66.17) v1(153.8,61.72) v1(153.8,57.28) v1(153.8,23.62) v1(154.43,128.4) v1(154.43,124.46) v1(154.51,101.14) v1(154.94,37.34) v1(155.07,28.19) v1(155.32,54.36) v1(155.96,115.32) v1(156.26,96.29) v1(156.46,51) v1(156.57,15.85) v1(156.72,87.5) v1(156.97,21.72) v1(157.1,42.55) v1(158.24,79.5) v1(158.24,75.06) v1(158.24,70.61) v1(158.24,66.17) v1(158.24,61.72) v1(158.24,57.28) v1(158.5,42.55) v1(158.88,128.4) v1(158.88,124.46) v1(158.88,86.36) v1(158.88,7.11) v1(159.21,106.91) v1(159.26,1.91) v1(159.66,50.9) v1(159.77,115.44) v1(159.99,56.95) v1(160.78,16) v1(160.78,12.83) v1(161.06,53.8) v1(161.29,101.35) v1(161.42,40.64) v1(161.8,100.2) v1(161.8,92.46) v1(161.8,86.36) v1(161.93,43.56) v1(162.03,59.16) v1(162.31,115.44) v1(162.74,101.12) v1(162.94,120.14) v1(162.86,112.6) v1(163.32,128.4) v1(163.32,16) v1(163.37,106.12) v1(163.45,37.34) v1(163.58,124.71) v1(163.55,62.56) v1(163.7,42.04) v1(163.83,66.78) v1(164.47,95.12) v1(164.59,50.88) v1(164.72,71.98) v1(164.8,80.37) v1(165,75.95) v1(165.48,104.27) v1(165.58,115.16) v1(165.61,106.93) v1(165.86,101.22) v1(165.94,95.63) v1(165.86,19.18) v1(166.32,59.16) v1(166.7,64.72) v1(167.51,124.84) v1(167.51,93.85) v1(167.54,80.62) v1(167.53,74.33) v1(167.63,70.21) v1(167.64,2.16) v1(167.69,103.58) v1(167.77,128.4) v1(167.89,106.93) v1(167.88,84.8) v1(167.89,64.01) v1(168.15,48.39) v1(168.28,98.42) v1(168.53,101.85) v1(169.42,86.03) v1(169.67,113.79) v1(169.67,22.35) v1(169.67,19.18) v1(169.88,105.77) v1(169.93,64.01) v1(170,57.15) v1(170.31,110.74) v1(170.43,102.74) v1(170.38,96.01) v1(170.43,43.69) v1(170.69,107.44) v1(170.86,84.25) v1(170.89,80.34) v1(170.94,7.75) v1(171.27,87.35) v1(172.31,115.47) v1(172.34,48.39) v1(172.37,126.31) v1(172.67,95.2) v1(172.85,75.06) v1(172.85,70.61) v1(172.85,65.53) v1(172.85,61.09) v1(173.25,96.82) v1(173.41,118.24) v1(173.61,92.08) v1(173.56,87.5) v1(173.86,17.4) v1(173.86,13.46) v1(173.86,9.4) v1(174.5,43.31) v1(175.5,83.17) v1(175.95,112.88) v1(175.9,42.29) v1(176.38,106.93) v1(176.4,32.51) v1(176.61,99.26) v1(176.73,116.23) v1(176.73,79.78) v1(176.91,92.84) v1(176.99,84.76) v1(177.04,39.12) v1(177.11,23.7) v1(177.29,75.06) v1(177.29,70.61) v1(177.29,65.53) v1(177.29,61.09) v1(177.29,20.45) v1(177.8,17.27) v1(178.05,30.1) v1(178.18,121.41) v1(178.31,34.29) v1(178.31,13.72) v1(178.31,9.65)
